# Allegro board Trans.brd
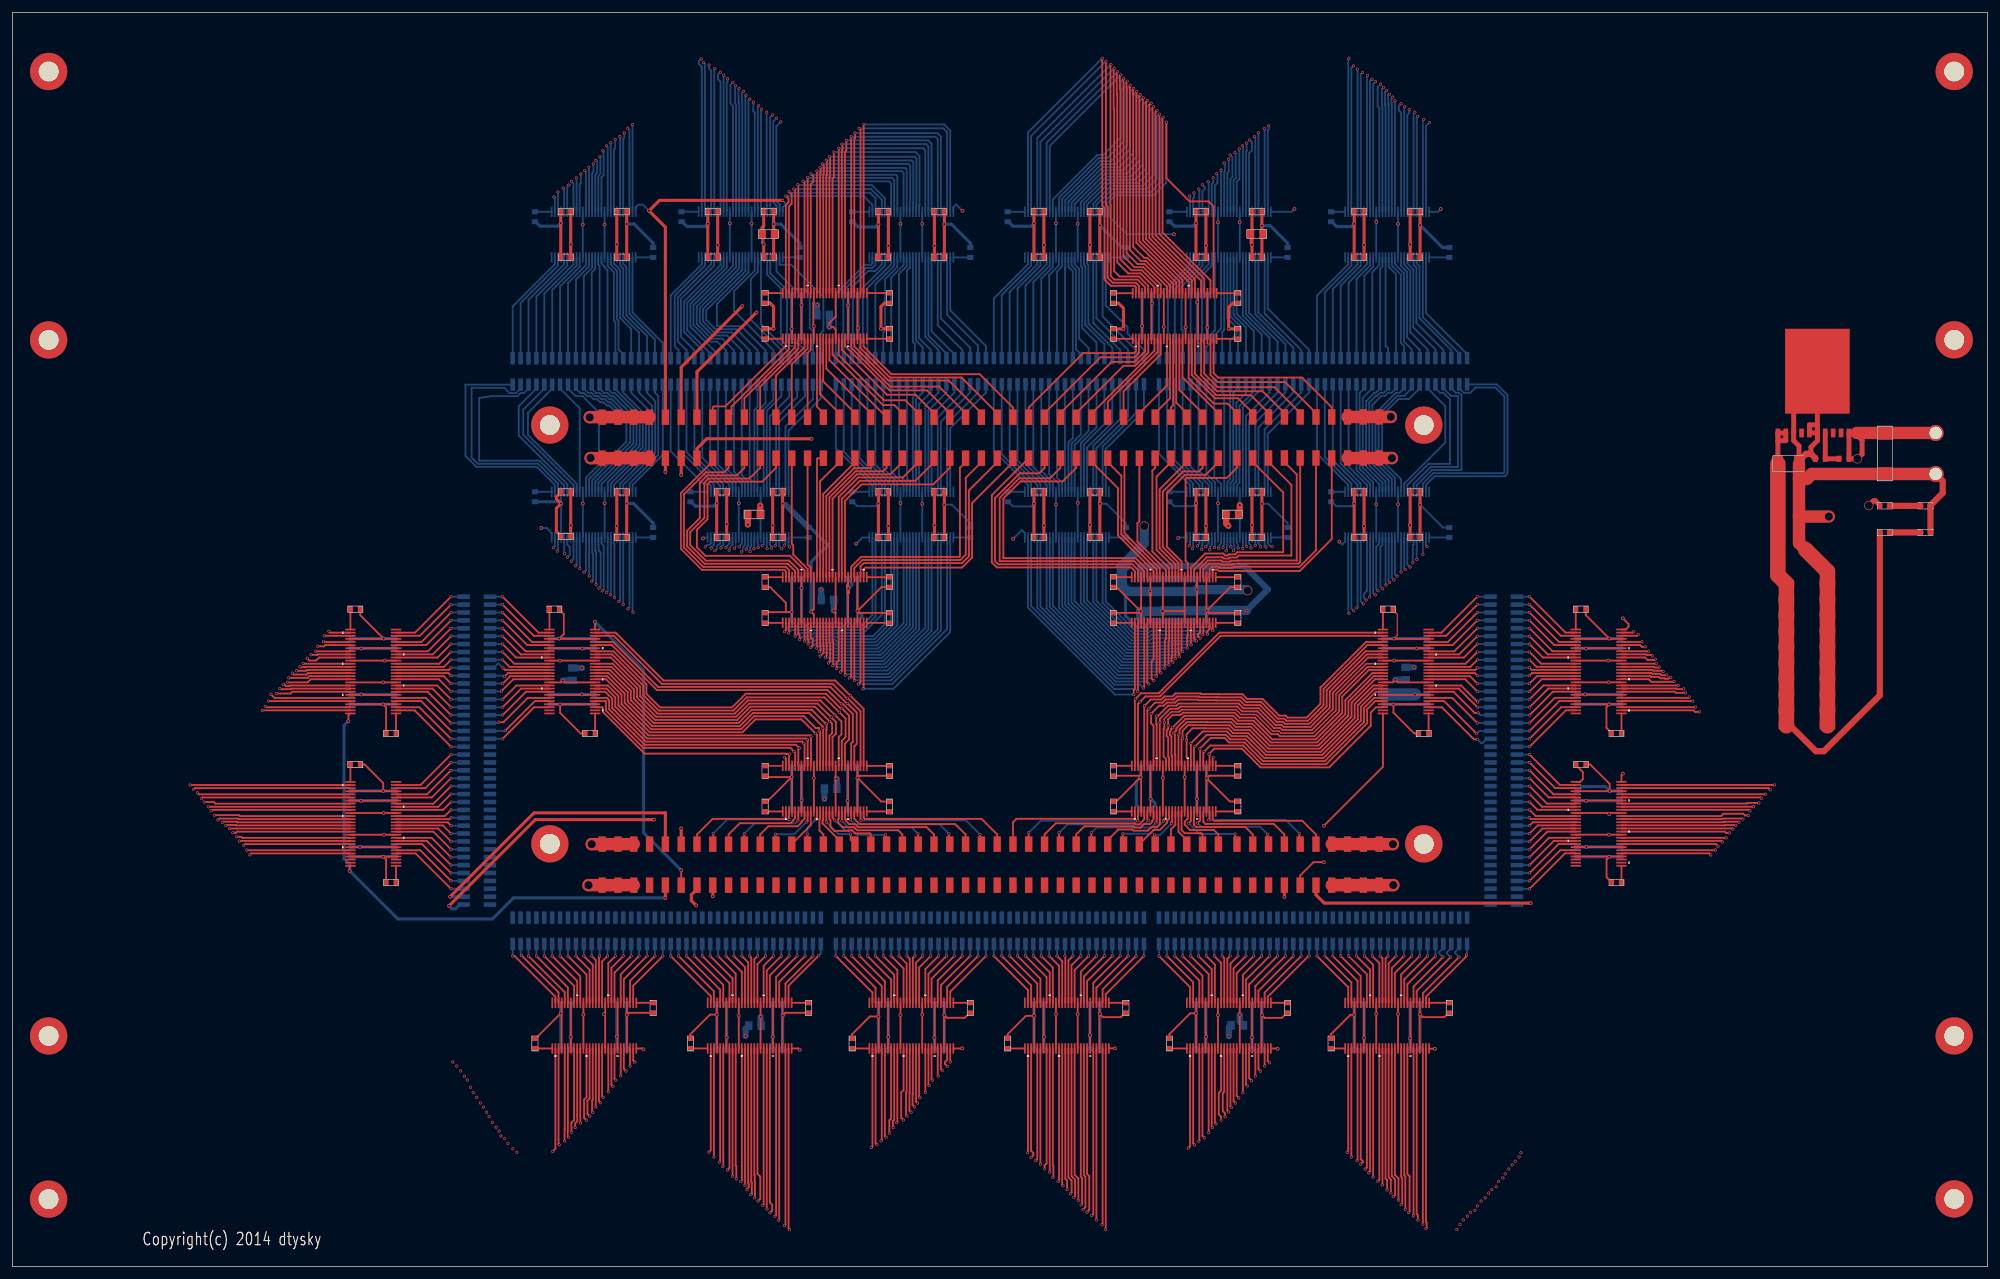
[diagram p0: board, top side]
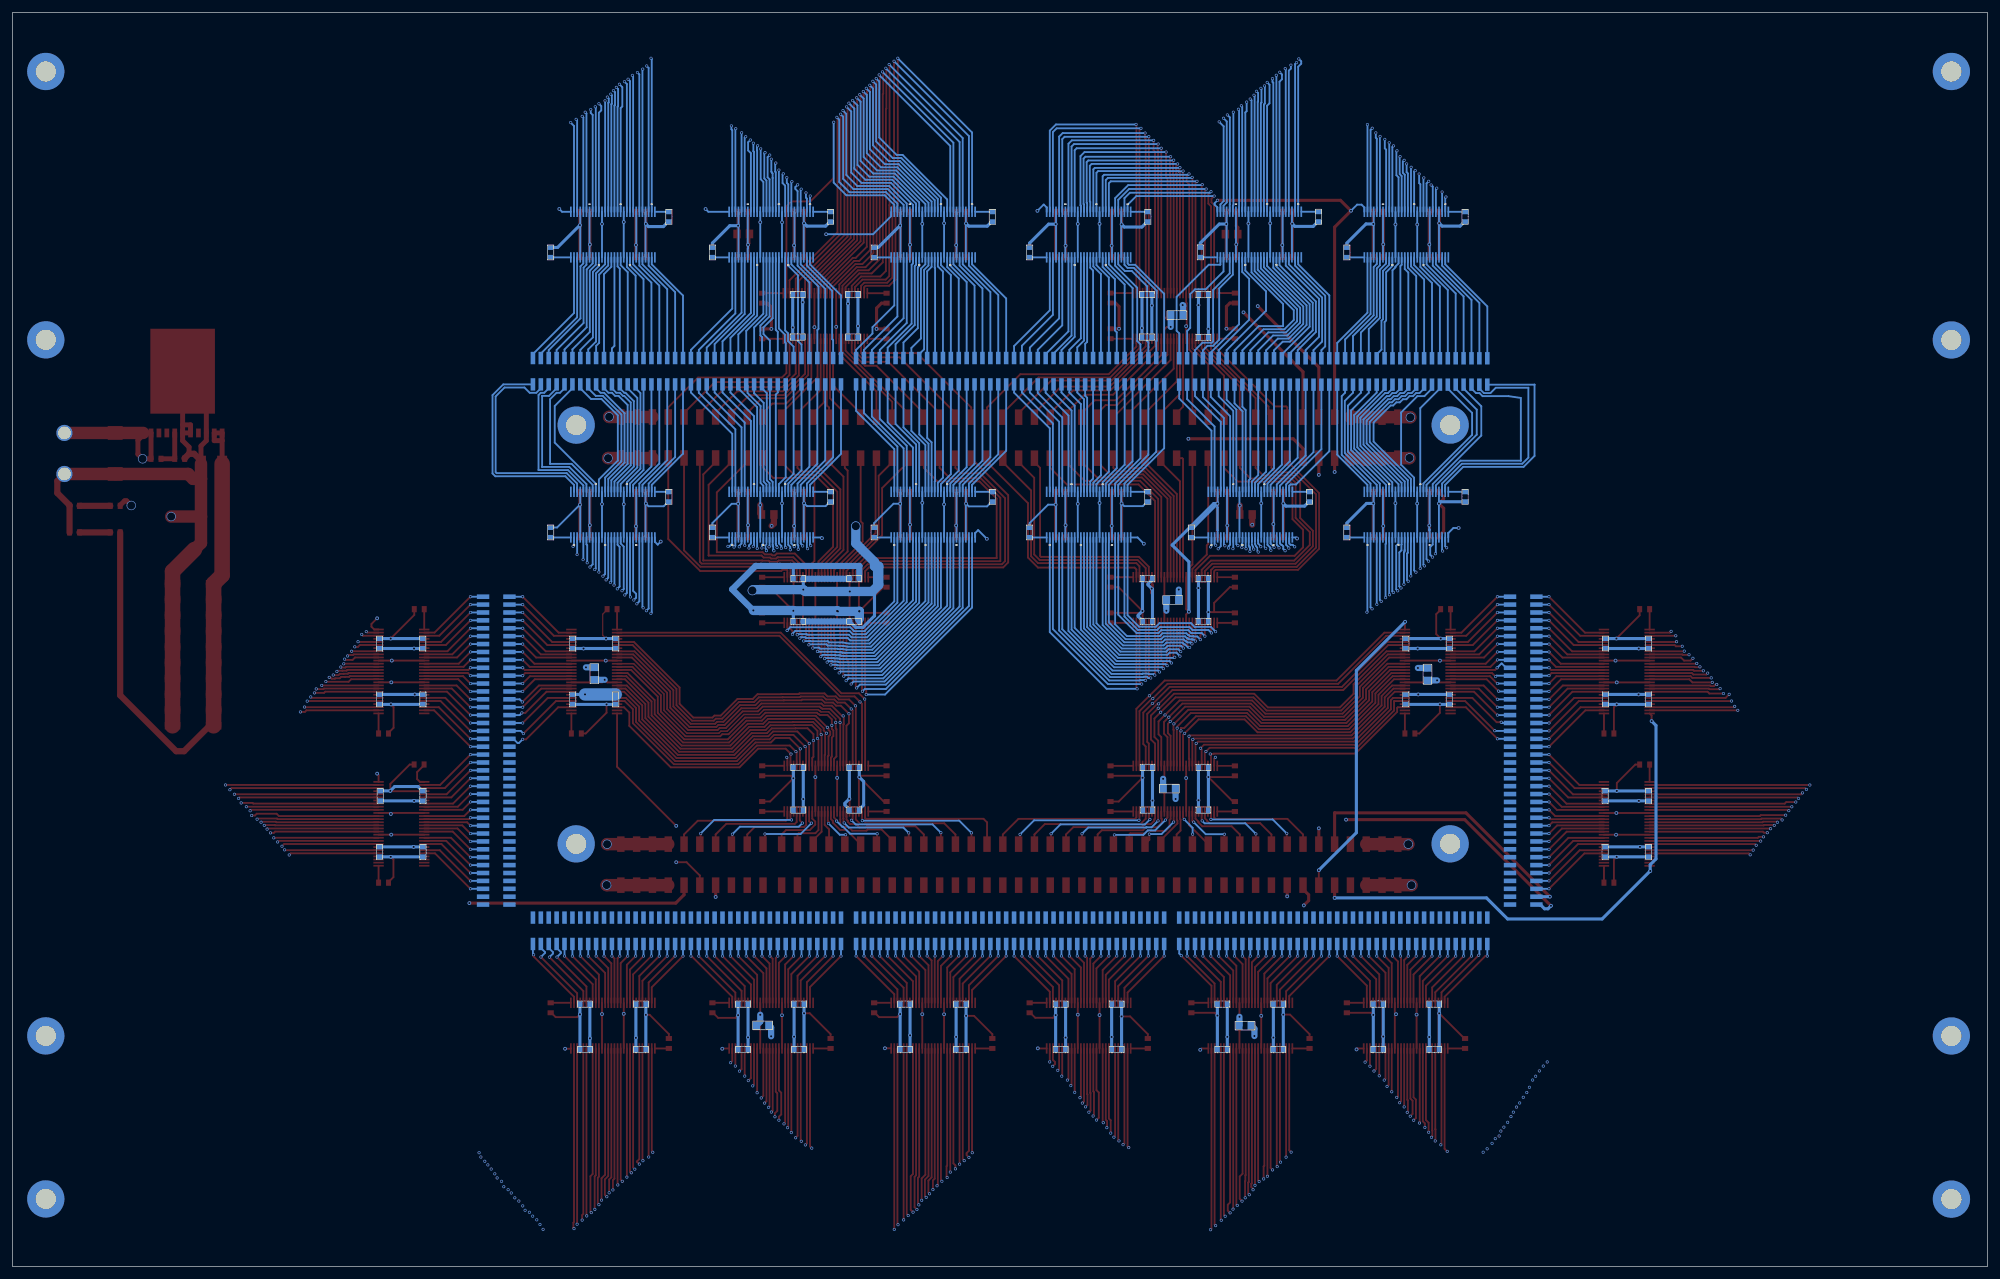
[diagram p1: board, bottom side, seen from below]

Outline 317.53 x 201.76 mm; copper layers: TOP, SIGNAL_1, SIGNAL_2, BOTTOM. Coordinates in mm from the lower left corner of the outline.
Outline path: rectangle 0,0 317.53,201.76

## Design rules (mm)
nets with their own width: min track width 0.5; nets DC GND VCC

## Placement (name value [footprint] x y rotation side)
C1  0.1u  [SMD_0603]  126.06 156.37 90 bottom
C2  0.1u  [SMD_0603]  135.15 156.37 270 bottom
C3  0.1u  [SMD_0603]  126.06 149.48 90 bottom
C4  0.1u  [SMD_0603]  135.16 149.54 270 bottom
C5  0.1u  [SMD_0603]  182.4 156.37 90 bottom
C6  0.1u  [SMD_0603]  191.29 156.37 270 bottom
C7  0.1u  [SMD_0603]  182.4 149.54 90 bottom
C8  0.1u  [SMD_0603]  191.29 149.54 270 bottom
C9  10u  [SMD_0805]  130.32 153.07 270 bottom
C10  0.1u  [SMD_0603]  126.06 110.65 90 bottom
C11  0.1u  [SMD_0603]  135.06 110.65 270 bottom
C12  0.1u  [SMD_0603]  126.06 103.78 90 bottom
C13  0.1u  [SMD_0603]  135.05 103.78 270 bottom
C14  0.1u  [SMD_0603]  182.18 110.65 90 bottom
C15  0.1u  [SMD_0603]  191.19 110.65 270 bottom
C16  0.1u  [SMD_0603]  182.18 103.78 90 bottom
C17  0.1u  [SMD_0603]  191.19 103.78 270 bottom
C18  10u  [SMD_0805]  131.02 107.24 270 bottom
C19  0.1u  [SMD_0603]  126.06 80.31 90 bottom
C20  0.1u  [SMD_0603]  135.05 80.31 270 bottom
C21  0.1u  [SMD_0603]  126.06 73.44 90 bottom
C22  0.1u  [SMD_0603]  135.05 73.44 270 bottom
C23  0.1u  [SMD_0603]  182.18 80.31 90 bottom
C24  0.1u  [SMD_0603]  191.19 80.31 270 bottom
C25  0.1u  [SMD_0603]  182.19 73.44 90 bottom
C26  0.1u  [SMD_0603]  191.19 73.44 270 bottom
C27  10u  [SMD_0805]  131.54 76.89 270 bottom
C28  22u  [SMD_1210]  285.52 129.15 90 top
C29  220u  [SMD_7343]  301.01 130.81 0 top
C30  10u  [SMD_0805]  121.53 166.09 90 top
C31  0.1u  [SMD_0603]  88.95 169.69 270 top
C32  0.1u  [SMD_0603]  97.95 169.69 90 top
C33  0.1u  [SMD_0603]  112.58 169.7 270 top
C34  0.1u  [SMD_0603]  121.58 169.7 90 top
C35  0.1u  [SMD_0603]  140.02 169.69 270 top
C36  0.1u  [SMD_0603]  149.02 169.69 90 top
C37  0.1u  [SMD_0603]  165.02 169.69 270 top
C38  0.1u  [SMD_0603]  174.02 169.69 90 top
C39  0.1u  [SMD_0603]  191.07 169.69 270 top
C40  0.1u  [SMD_0603]  200.07 169.69 90 top
C41  0.1u  [SMD_0603]  216.5 169.69 270 top
C42  0.1u  [SMD_0603]  225.5 169.69 90 top
C43  0.1u  [SMD_0603]  88.95 162.39 270 top
C44  0.1u  [SMD_0603]  97.95 162.39 90 top
C45  0.1u  [SMD_0603]  112.58 162.4 270 top
C46  0.1u  [SMD_0603]  121.58 162.4 90 top
C47  0.1u  [SMD_0603]  140.02 162.39 270 top
C48  0.1u  [SMD_0603]  149.02 162.39 90 top
C49  0.1u  [SMD_0603]  165.02 162.39 270 top
C50  0.1u  [SMD_0603]  174.02 162.39 90 top
C51  0.1u  [SMD_0603]  191.07 162.39 270 top
C52  0.1u  [SMD_0603]  200.07 162.39 90 top
C53  0.1u  [SMD_0603]  216.5 162.39 270 top
C54  0.1u  [SMD_0603]  225.5 162.39 90 top
C55  10u  [SMD_0805]  200.04 166.12 90 top
C56  10u  [SMD_0805]  119.22 120.99 90 top
C57  0.1u  [SMD_0603]  88.95 124.62 270 top
C58  0.1u  [SMD_0603]  97.95 124.62 90 top
C59  0.1u  [SMD_0603]  114.02 124.62 270 top
C60  0.1u  [SMD_0603]  123.02 124.62 90 top
C61  0.1u  [SMD_0603]  140.02 124.62 270 top
C62  0.1u  [SMD_0603]  149.02 124.62 90 top
C63  0.1u  [SMD_0603]  165.02 124.62 270 top
C64  0.1u  [SMD_0603]  174.02 124.62 90 top
C65  0.1u  [SMD_0603]  191.07 124.62 270 top
C66  0.1u  [SMD_0603]  200.07 124.62 90 top
C67  0.1u  [SMD_0603]  216.5 124.62 270 top
C68  0.1u  [SMD_0603]  225.5 124.62 90 top
C69  0.1u  [SMD_0603]  88.95 117.48 270 top
C70  0.1u  [SMD_0603]  97.95 117.32 90 top
C71  0.1u  [SMD_0603]  114.02 117.32 270 top
C72  0.1u  [SMD_0603]  123.02 117.32 90 top
C73  0.1u  [SMD_0603]  140.02 117.32 270 top
C74  0.1u  [SMD_0603]  149.02 117.32 90 top
C75  0.1u  [SMD_0603]  165.02 117.32 270 top
C76  0.1u  [SMD_0603]  174.02 117.32 90 top
C77  0.1u  [SMD_0603]  191.07 117.32 270 top
C78  0.1u  [SMD_0603]  200.07 117.32 90 top
C79  0.1u  [SMD_0603]  216.5 117.32 270 top
C80  0.1u  [SMD_0603]  225.5 117.32 90 top
C81  10u  [SMD_0805]  196.11 120.99 90 top
C82  10u  [SMD_0805]  119.37 38.76 270 bottom
C83  0.1u  [SMD_0603]  88.95 42.23 90 bottom
C84  0.1u  [SMD_0603]  97.95 42.23 270 bottom
C85  0.1u  [SMD_0603]  114.02 42.23 90 bottom
C86  0.1u  [SMD_0603]  123.02 42.23 270 bottom
C87  0.1u  [SMD_0603]  140.02 42.23 90 bottom
C88  0.1u  [SMD_0603]  149.02 42.23 270 bottom
C89  0.1u  [SMD_0603]  165.02 42.23 90 bottom
C90  0.1u  [SMD_0603]  174.02 42.23 270 bottom
C91  0.1u  [SMD_0603]  191.07 42.23 90 bottom
C92  0.1u  [SMD_0603]  200.07 42.23 270 bottom
C93  0.1u  [SMD_0603]  216.5 42.23 90 bottom
C94  0.1u  [SMD_0603]  225.5 42.23 270 bottom
C95  0.1u  [SMD_0603]  88.95 34.93 90 bottom
C96  0.1u  [SMD_0603]  97.95 34.93 270 bottom
C97  0.1u  [SMD_0603]  114.02 34.93 90 bottom
C98  0.1u  [SMD_0603]  123.02 34.93 270 bottom
C99  0.1u  [SMD_0603]  140.02 34.93 90 bottom
C100  0.1u  [SMD_0603]  149.02 34.93 270 bottom
C101  0.1u  [SMD_0603]  165.02 34.93 90 bottom
C102  0.1u  [SMD_0603]  174.02 34.93 270 bottom
C103  0.1u  [SMD_0603]  191.07 34.93 90 bottom
C104  0.1u  [SMD_0603]  200.07 34.93 270 bottom
C105  0.1u  [SMD_0603]  216.5 34.93 90 bottom
C106  0.1u  [SMD_0603]  225.5 34.93 270 bottom
C107  10u  [SMD_0805]  196.91 38.8 270 bottom
C108  0.1u  [SMD_0603]  54.49 100.23 0 bottom
C109  0.1u  [SMD_0603]  54.49 91.24 180 bottom
C110  0.1u  [SMD_0603]  61.42 100.23 0 bottom
C111  0.1u  [SMD_0603]  61.42 91.24 180 bottom
C112  0.1u  [SMD_0603]  54.5 75.72 0 bottom
C113  0.1u  [SMD_0603]  54.5 66.72 180 bottom
C114  0.1u  [SMD_0603]  61.49 75.72 0 bottom
C115  0.1u  [SMD_0603]  61.49 66.72 180 bottom
C116  0.1u  [SMD_0603]  86.53 100.24 0 bottom
C117  0.1u  [SMD_0603]  86.53 91.24 180 bottom
C118  0.1u  [SMD_0603]  93.52 100.23 0 bottom
C119  0.1u  [SMD_0603]  93.52 91.24 180 bottom
C120  0.1u  [SMD_0603]  220.54 100.23 0 bottom
C121  0.1u  [SMD_0603]  220.54 91.24 180 bottom
C122  0.1u  [SMD_0603]  227.46 100.23 0 bottom
C123  0.1u  [SMD_0603]  227.46 91.24 180 bottom
C124  0.1u  [SMD_0603]  251.56 100.23 0 bottom
C125  0.1u  [SMD_0603]  251.53 91.24 180 bottom
C126  0.1u  [SMD_0603]  258.52 100.23 0 bottom
C127  0.1u  [SMD_0603]  258.52 91.24 180 bottom
C128  0.1u  [SMD_0603]  251.53 75.72 0 bottom
C129  0.1u  [SMD_0603]  251.53 66.72 180 bottom
C130  0.1u  [SMD_0603]  258.41 75.73 0 bottom
C131  0.1u  [SMD_0603]  258.53 66.72 180 bottom
C132  10u  [SMD_0805]  90.04 95.3 180 bottom
C133  10u  [SMD_0805]  223.98 95.4 180 bottom
D1  0603_LED  [SMD_0603]  307.55 118.11 90 top
D2  0603_LED  [SMD_0603]  307.55 122.38 90 top
J1  Header_2X40  [HEADER_2X40_2D54_SMT_G]  144.34 133.35 90 top
J2  Header_2X10  [HEADER_2X10_2D54_SMT_G]  208.29 133.38 90 top
J3  Header_2X10  [HEADER_2X10_2D54_SMT_G]  288.49 98.43 0 top
J4  Header_2X40  [HEADER_2X40_2D54_SMT_G]  144.34 64.66 90 top
J5  Header_2X10  [HEADER_2X10_2D54_SMT_G]  208.29 64.66 90 top
J6  Header_2X40  [HEADER_2X40_1D27_SMT_M]  105.19 144 270 bottom
J7  Header_2X40  [HEADER_2X40_1D27_SMT_M]  157.14 144.04 270 bottom
J8  Header_2X40  [HEADER_2X40_1D27_SMT_M]  209.09 144.04 270 bottom
J9  Header_2X40  [HEADER_2X40_1D27_SMT_M]  74.65 83 180 bottom
J10  Header_2X40  [HEADER_2X40_1D27_SMT_M]  239.75 83 180 bottom
J11  Header_2X40  [HEADER_2X40_1D27_SMT_M]  105.19 54.02 270 bottom
J12  Header_2X40  [HEADER_2X40_1D27_SMT_M]  157.14 54.02 270 bottom
J13  Header_2X40  [HEADER_2X40_1D27_SMT_M]  209.09 54.02 270 bottom
J14  Header_1  [STITCH_2_MM]  309.18 134.11 0 top
J15  Header_1  [STITCH_2_MM]  309.18 127.51 0 top
J16  Header_1  [HOLE_3D2]  86.39 135.38 0 top
J17  Header_1  [HOLE_3D2]  226.9 135.37 0 top
J18  Header_1  [HOLE_3D2]  86.4 68.01 0 top
J19  Header_1  [HOLE_3D2]  226.9 68 0 top
J20  Header_1  [HOLE_3D2]  5.82 192.26 0 top
J21  Header_1  [HOLE_3D2]  5.82 149.07 0 top
J22  Header_1  [HOLE_3D2]  5.82 37.1 0 top
J23  Header_1  [HOLE_3D2]  5.81 10.85 0 top
J24  Header_1  [HOLE_3D2]  312.17 192.26 0 top
J25  Header_1  [HOLE_3D2]  312.17 149.09 0 top
J26  Header_1  [HOLE_3D2]  312.17 37.11 0 top
J27  Header_1  [HOLE_3D2]  312.17 10.88 0 top
R1  4.7K  [SMD_0603]  141 155.81 0 top
R2  4.7K  [SMD_0603]  121 155.81 0 top
R3  4.7K  [SMD_0603]  177 155.79 0 top
R4  4.7K  [SMD_0603]  197 155.79 0 top
R5  4.7K  [SMD_0603]  121 150.07 180 top
R6  4.7K  [SMD_0603]  177 150.05 180 top
R7  4.7K  [SMD_0603]  141 150.07 180 top
R8  4.7K  [SMD_0603]  197 150.05 180 top
R9  4.7K  [SMD_0603]  121 110.1 0 top
R10  4.7K  [SMD_0603]  177 110.1 0 top
R11  4.7K  [SMD_0603]  141 110.1 0 top
R12  4.7K  [SMD_0603]  197 110.1 0 top
R13  4.7K  [SMD_0603]  141 104.36 180 top
R14  4.7K  [SMD_0603]  197 104.36 180 top
R15  4.7K  [SMD_0603]  121 104.36 180 top
R16  4.7K  [SMD_0603]  177 104.36 180 top
R17  4.7K  [SMD_0603]  121 79.75 0 top
R18  4.7K  [SMD_0603]  141 79.75 0 top
R19  4.7K  [SMD_0603]  197 79.76 0 top
R20  4.7K  [SMD_0603]  177 79.76 0 top
R21  4.7K  [SMD_0603]  121 74.01 180 top
R22  4.7K  [SMD_0603]  177 74.02 180 top
R23  4.7K  [SMD_0603]  141 74.01 180 top
R24  4.7K  [SMD_0603]  197 74.02 180 top
R25  3.32K  [SMD_0603]  294.45 129.95 90 top
R26  1.07K  [SMD_0603]  290.64 129.95 270 top
R27  1K  [SMD_0603]  301.01 118.11 90 top
R28  1K  [SMD_0603]  301.01 122.38 90 top
R29  4.7K  [SMD_0603]  103 163.15 0 bottom
R30  4.7K  [SMD_0603]  126.56 163.16 0 bottom
R31  4.7K  [SMD_0603]  154 163.15 0 bottom
R32  4.7K  [SMD_0603]  179 163.15 0 bottom
R33  4.7K  [SMD_0603]  205 163.15 0 bottom
R34  4.7K  [SMD_0603]  231 163.15 0 bottom
R35  4.7K  [SMD_0603]  84 168.89 0 bottom
R36  4.7K  [SMD_0603]  107.56 168.9 0 bottom
R37  4.7K  [SMD_0603]  135 168.89 0 bottom
R38  4.7K  [SMD_0603]  160 168.89 0 bottom
R39  4.7K  [SMD_0603]  186 168.89 0 bottom
R40  4.7K  [SMD_0603]  212 168.89 0 bottom
R41  4.7K  [SMD_0603]  103 118.1 180 bottom
R42  4.7K  [SMD_0603]  128 118.1 180 bottom
R43  4.7K  [SMD_0603]  154 118.1 180 bottom
R44  4.7K  [SMD_0603]  179 118.1 180 bottom
R45  4.7K  [SMD_0603]  205 118.1 180 bottom
R46  4.7K  [SMD_0603]  231 118.1 180 bottom
R47  4.7K  [SMD_0603]  84 123.84 180 bottom
R48  4.7K  [SMD_0603]  109 123.84 180 bottom
R49  4.7K  [SMD_0603]  135 123.84 180 bottom
R50  4.7K  [SMD_0603]  160 123.84 180 bottom
R51  4.7K  [SMD_0603]  186 123.84 180 bottom
R52  4.7K  [SMD_0603]  212 123.84 180 bottom
R53  4.7K  [SMD_0603]  252.13 105.76 270 top
R54  4.7K  [SMD_0603]  55.13 105.76 90 top
R55  4.7K  [SMD_0603]  87.13 105.76 90 top
R56  4.7K  [SMD_0603]  221.13 105.76 90 top
R57  4.7K  [SMD_0603]  257.87 85.76 270 top
R58  4.7K  [SMD_0603]  252.15 80.77 270 top
R59  4.7K  [SMD_0603]  55.13 80.76 90 top
R60  4.7K  [SMD_0603]  60.87 85.76 90 top
R61  4.7K  [SMD_0603]  92.87 85.76 90 top
R62  4.7K  [SMD_0603]  226.87 85.76 90 top
R63  4.7K  [SMD_0603]  257.87 61.76 270 top
R64  4.7K  [SMD_0603]  60.87 61.76 90 top
R65  4.7K  [SMD_0603]  103 41.63 0 top
R66  4.7K  [SMD_0603]  128 41.63 0 top
R67  4.7K  [SMD_0603]  154 41.63 0 top
R68  4.7K  [SMD_0603]  179 41.63 0 top
R69  4.7K  [SMD_0603]  205 41.63 0 top
R70  4.7K  [SMD_0603]  231 41.63 0 top
R71  4.7K  [SMD_0603]  84 35.89 0 top
R72  4.7K  [SMD_0603]  109 35.89 0 top
R73  4.7K  [SMD_0603]  135 35.89 0 top
R74  4.7K  [SMD_0603]  160 35.89 0 top
R75  4.7K  [SMD_0603]  186 35.89 0 top
R76  4.7K  [SMD_0603]  212 35.89 0 top
U1  Value  [DGG56]  130.59 152.94 270 top
U2  Value  [DGG56]  186.85 152.92 270 top
U3  Value  [DGG56]  130.59 107.23 90 top
U4  Value  [DGG56]  186.7 107.23 90 top
U5  Value  [DGG56]  130.59 76.88 270 top
U6  Value  [DGG56]  186.7 76.89 270 top
U7  Value  [TZA11A]  290.17 144.27 0 top
U8  Value  [DGG56]  93.44 166.02 90 bottom
U9  Value  [DGG56]  117.08 166.03 90 bottom
U10  Value  [DGG56]  144.51 166.02 90 bottom
U11  Value  [DGG56]  169.51 166.02 90 bottom
U12  Value  [DGG56]  195.56 166.02 90 bottom
U13  Value  [DGG56]  221 166.02 90 bottom
U14  Value  [DGG56]  93.45 120.97 270 bottom
U15  Value  [DGG56]  118.52 120.97 270 bottom
U16  Value  [DGG56]  144.51 120.97 270 bottom
U17  Value  [DGG56]  169.51 120.97 270 bottom
U18  Value  [DGG56]  195.56 120.97 270 bottom
U19  Value  [DGG56]  221 120.97 270 bottom
U20  Value  [DGG56]  255 95.74 0 top
U21  Value  [DGG56]  58 95.73 180 top
U22  Value  [DGG56]  90 95.73 0 top
U23  Value  [DGG56]  224 95.73 180 top
U24  Value  [DGG56]  255 71.23 0 top
U25  Value  [DGG56]  58 71.22 180 top
U26  Value  [DGG56]  93.54 38.76 270 top
U27  Value  [DGG56]  118.52 38.76 270 top
U28  Value  [DGG56]  144.51 38.76 270 top
U29  Value  [DGG56]  169.51 38.76 270 top
U30  Value  [DGG56]  195.56 38.76 270 top
U31  Value  [DGG56]  221 38.76 270 top

## Library data of the parts
C1-C27 C30-C133 = CAP NP
C28 C29 = CAP POL
D1 D2 = DIODE SCHOTTKY
J1 J4 J6-J13 = Header_2X40
J2 J3 J5 = Header_2X10
J14-J27 = Header_1
R1-R76 = R
U1-U6 = SN74ALVCH162827_DGG_56
U7 = LMZ22010_NDY_11
U8-U31 = SN74ALVCH16721_DGG_56

## Footprints (pads in the part's own frame, mm; a bottom-side part is the same pattern mirrored in y, then rotated)
DGG56
  rect 1.676x0.279 smd: 1(-3.67,6.75) 2(-3.67,6.25) 3(-3.67,5.75) 4(-3.67,5.25) 5(-3.67,4.75) 6(-3.67,4.25) 7(-3.67,3.75) 8(-3.67,3.25) 9(-3.67,2.75) 10(-3.67,2.25) 11(-3.67,1.75) 12(-3.67,1.25) 13(-3.67,0.75) 14(-3.67,0.25) 15(-3.67,-0.25) 16(-3.67,-0.75) 17(-3.67,-1.25) 18(-3.67,-1.75) 19(-3.67,-2.25) 20(-3.67,-2.75) 21(-3.67,-3.25) 22(-3.67,-3.75) 23(-3.67,-4.25) 24(-3.67,-4.75) 25(-3.67,-5.25) 26(-3.67,-5.75) 27(-3.67,-6.25) 28(-3.67,-6.75) 29(3.67,-6.75) 30(3.67,-6.25) 31(3.67,-5.75) 32(3.67,-5.25) 33(3.67,-4.75) 34(3.67,-4.25) 35(3.67,-3.75) 36(3.67,-3.25) 37(3.67,-2.75) 38(3.67,-2.25) 39(3.67,-1.75) 40(3.67,-1.25) 41(3.67,-0.75) 42(3.67,-0.25) 43(3.67,0.25) 44(3.67,0.75) 45(3.67,1.25) 46(3.67,1.75) 47(3.67,2.25) 48(3.67,2.75) 49(3.67,3.25) 50(3.67,3.75) 51(3.67,4.25) 52(3.67,4.75) 53(3.67,5.25) 54(3.67,5.75) 55(3.67,6.25) 56(3.67,6.75)
HEADER_2X10_2D54_SMT_G
  rect 2.5x1.2 smd: 1(-3.3,11.43) 2(-3.3,8.89) 3(-3.3,6.35) 4(-3.3,3.81) 5(-3.3,1.27) 6(-3.3,-1.27) 7(-3.3,-3.81) 8(-3.3,-6.35) 9(-3.3,-8.89) 10(-3.3,-11.43) 11(3.3,-11.43) 12(3.3,-8.89) 13(3.3,-6.35) 14(3.3,-3.81) 15(3.3,-1.27) 16(3.3,1.27) 17(3.3,3.81) 18(3.3,6.35) 19(3.3,8.89) 20(3.3,11.43)
HEADER_2X40_1D27_SMT_M
  rect 2x0.74 smd: 1(-2.12,24.765) 2(-2.12,23.495) 3(-2.12,22.225) 4(-2.12,20.955) 5(-2.12,19.685) 6(-2.12,18.415) 7(-2.12,17.145) 8(-2.12,15.875) 9(-2.12,14.605) 10(-2.12,13.335) 11(-2.12,12.065) 12(-2.12,10.795) 13(-2.12,9.525) 14(-2.12,8.255) 15(-2.12,6.985) 16(-2.12,5.715) 17(-2.12,4.445) 18(-2.12,3.175) 19(-2.12,1.905) 20(-2.12,0.635) 21(-2.12,-0.635) 22(-2.12,-1.905) 23(-2.12,-3.175) 24(-2.12,-4.445) 25(-2.12,-5.715) 26(-2.12,-6.985) 27(-2.12,-8.255) 28(-2.12,-9.525) 29(-2.12,-10.795) 30(-2.12,-12.065) 31(-2.12,-13.335) 32(-2.12,-14.605) 33(-2.12,-15.875) 34(-2.12,-17.145) 35(-2.12,-18.415) 36(-2.12,-19.685) 37(-2.12,-20.955) 38(-2.12,-22.225) 39(-2.12,-23.495) 40(-2.12,-24.765) 41(2.12,-24.765) 42(2.12,-23.495) 43(2.12,-22.225) 44(2.12,-20.955) 45(2.12,-19.685) 46(2.12,-18.415) 47(2.12,-17.145) 48(2.12,-15.875) 49(2.12,-14.605) 50(2.12,-13.335) 51(2.12,-12.065) 52(2.12,-10.795) 53(2.12,-9.525) 54(2.12,-8.255) 55(2.12,-6.985) 56(2.12,-5.715) 57(2.12,-4.445) 58(2.12,-3.175) 59(2.12,-1.905) 60(2.12,-0.635) 61(2.12,0.635) 62(2.12,1.905) 63(2.12,3.175) 64(2.12,4.445) 65(2.12,5.715) 66(2.12,6.985) 67(2.12,8.255) 68(2.12,9.525) 69(2.12,10.795) 70(2.12,12.065) 71(2.12,13.335) 72(2.12,14.605) 73(2.12,15.875) 74(2.12,17.145) 75(2.12,18.415) 76(2.12,19.685) 77(2.12,20.955) 78(2.12,22.225) 79(2.12,23.495) 80(2.12,24.765)
HEADER_2X40_2D54_SMT_G
  rect 2.5x1.2 smd: 1(-3.3,49.53) 2(-3.3,46.99) 3(-3.3,44.45) 4(-3.3,41.91) 5(-3.3,39.37) 6(-3.3,36.83) 7(-3.3,34.29) 8(-3.3,31.75) 9(-3.3,29.21) 10(-3.3,26.67) 11(-3.3,24.13) 12(-3.3,21.59) 13(-3.3,19.05) 14(-3.3,16.51) 15(-3.3,13.97) 16(-3.3,11.43) 17(-3.3,8.89) 18(-3.3,6.35) 19(-3.3,3.81) 20(-3.3,1.27) 21(-3.3,-1.27) 22(-3.3,-3.81) 23(-3.3,-6.35) 24(-3.3,-8.89) 25(-3.3,-11.43) 26(-3.3,-13.97) 27(-3.3,-16.51) 28(-3.3,-19.05) 29(-3.3,-21.59) 30(-3.3,-24.13) 31(-3.3,-26.67) 32(-3.3,-29.21) 33(-3.3,-31.75) 34(-3.3,-34.29) 35(-3.3,-36.83) 36(-3.3,-39.37) 37(-3.3,-41.91) 38(-3.3,-44.45) 39(-3.3,-46.99) 40(-3.3,-49.53) 41(3.3,-49.53) 42(3.3,-46.99) 43(3.3,-44.45) 44(3.3,-41.91) 45(3.3,-39.37) 46(3.3,-36.83) 47(3.3,-34.29) 48(3.3,-31.75) 49(3.3,-29.21) 50(3.3,-26.67) 51(3.3,-24.13) 52(3.3,-21.59) 53(3.3,-19.05) 54(3.3,-16.51) 55(3.3,-13.97) 56(3.3,-11.43) 57(3.3,-8.89) 58(3.3,-6.35) 59(3.3,-3.81) 60(3.3,-1.27) 61(3.3,1.27) 62(3.3,3.81) 63(3.3,6.35) 64(3.3,8.89) 65(3.3,11.43) 66(3.3,13.97) 67(3.3,16.51) 68(3.3,19.05) 69(3.3,21.59) 70(3.3,24.13) 71(3.3,26.67) 72(3.3,29.21) 73(3.3,31.75) 74(3.3,34.29) 75(3.3,36.83) 76(3.3,39.37) 77(3.3,41.91) 78(3.3,44.45) 79(3.3,46.99) 80(3.3,49.53)
HOLE_3D2
  round 6 hole 3.2: 1(0,0)
SMD_0603
  rect 1x0.8 smd: 1(0,0.8) 2(0,-0.8)
SMD_0805
  rect 1.4x1.2 smd: 1(0,1) 2(0,-1)
SMD_1210
  rect 2.6x1.6 smd: 1(0,1.7) 2(0,-1.7)
SMD_7343
  rect 2.4x2.2 smd: 1(0,3.3) 2(0,-3.3)
STITCH_2_MM
  round 2.6 hole 2: 1(0,0)
TZA11A
  rect 0.762x1.422 smd: 1(-6.35,-10.16) 2(-5.08,-10.16) 3(-3.81,-10.16) 4(-2.54,-10.16) 5(-1.27,-10.16) 6(0,-10.16) 7(1.27,-10.16) 8(2.54,-10.16) 9(3.81,-10.16) 10(5.08,-10.16) 11(6.35,-10.16)
  rect 10.389x13.665 smd: 12(0,-0.229)

## Nets
GND: C1.2 C2.2 C3.2 C4.2 C5.2 C6.2 C7.2 C8.2 C9.2 C10.2 C11.2 C12.2 C13.2 C14.2 C15.2 C16.2 C17.2 C18.2 C19.2 C20.2 C21.2 C22.2 C23.2 C24.2 C25.2 C26.2 C27.2 C28.2 C29.2 C30.2 C31.2 C32.2 C33.2 C34.2 C35.2 C36.2 C37.2 C38.2 C39.2 C40.2 C41.2 C42.2 C43.2 C44.2 C45.2 C46.2 C47.2 C48.2 C49.2 C50.2 C51.2 C52.2 C53.2 C54.2 C55.2 C56.2 C57.2 C58.2 C59.2 C60.2 C61.2 C62.2 C63.2 C64.2 C65.2 C66.2 C67.2 C68.2 C69.2 C70.2 C71.2 C72.2 C73.2 C74.2 C75.2 C76.2 C77.2 C78.2 C79.2 C80.2 C81.2 C82.2 C83.2 C84.2 C85.2 C86.2 C87.2 C88.2 C89.2 C90.2 C91.2 C92.2 C93.2 C94.2 C95.2 C96.2 C97.2 C98.2 C99.2 C100.2 C101.2 C102.2 C103.2 C104.2 C105.2 C106.2 C107.2 C108.2 C109.2 C110.2 C111.2 C112.2 C113.2 C114.2 C115.2 C116.2 C117.2 C118.2 C119.2 C120.2 C121.2 C122.2 C123.2 C124.2 C125.2 C126.2 C127.2 C128.2 C129.2 C130.2 C131.2 C132.2 C133.2 D1.2(CATHODE) D2.2(CATHODE) J1.1(DIP_1) J1.2(DIP_2) J1.3(DIP_3) J1.4(DIP_4) J2.8(DIP_8) J2.9(DIP_9) J2.10(DIP_10) J3.11(DIP_11) J3.12(DIP_12) J3.13(DIP_13) J3.14(DIP_14) J3.15(DIP_15) J3.16(DIP_16) J3.17(DIP_17) J3.18(DIP_18) J3.19(DIP_19) J3.20(DIP_20) J4.1(DIP_1) J4.2(DIP_2) J4.3(DIP_3) J5.7(DIP_7) J5.8(DIP_8) J5.9(DIP_9) J5.10(DIP_10) J15.1 R1.2 R2.2 R3.2 R4.2 R5.2 R6.2 R7.2 R8.2 R9.2 R10.2 R11.2 R12.2 R13.2 R14.2 R15.2 R16.2 R17.2 R18.2 R19.2 R20.2 R21.2 R22.2 R23.2 R24.2 R26.2 R29.2 R30.2 R31.2 R32.2 R33.2 R34.2 R35.1 R36.1 R37.1 R38.1 R39.1 R40.1 R41.1 R42.1 R43.1 R44.1 R45.1 R46.1 R47.2 R48.2 R49.2 R50.2 R51.2 R52.2 R53.1 R54.2 R55.2 R56.2 R57.2 R58.1 R59.2 R60.1 R61.1 R62.1 R63.2 R64.1 R65.2 R66.2 R67.2 R68.2 R69.2 R70.2 R71.1 R72.1 R73.1 R74.1 R75.1 R76.1 U1.4(GND) U1.11(GND_1) U1.18(GND_2) U1.25(GND_3) U1.32(GND_4) U1.39(GND_5) U1.46(GND_6) U1.53(GND_7) U2.4(GND) U2.11(GND_1) U2.18(GND_2) U2.25(GND_3) U2.32(GND_4) U2.39(GND_5) U2.46(GND_6) U2.53(GND_7) U3.4(GND) U3.11(GND_1) U3.18(GND_2) U3.25(GND_3) U3.32(GND_4) U3.39(GND_5) U3.46(GND_6) U3.53(GND_7) U4.4(GND) U4.11(GND_1) U4.18(GND_2) U4.25(GND_3) U4.32(GND_4) U4.39(GND_5) U4.46(GND_6) U4.53(GND_7) U5.4(GND) U5.11(GND_1) U5.18(GND_2) U5.25(GND_3) U5.32(GND_4) U5.39(GND_5) U5.46(GND_6) U5.53(GND_7) U6.4(GND) U6.11(GND_1) U6.18(GND_2) U6.25(GND_3) U6.32(GND_4) U6.39(GND_5) U6.46(GND_6) U6.53(GND_7) U7.3(SYNC) U7.5(AGND) U7.6(AGND_1) U7.12 U8.4(GND) U8.11(GND_1) U8.18(GND_2) U8.25(GND_3) U8.32(GND_4) U8.39(GND_5) U8.46(GND_6) U8.53(GND_7) U9.4(GND) U9.11(GND_1) U9.18(GND_2) U9.25(GND_3) U9.32(GND_4) U9.39(GND_5) U9.46(GND_6) U9.53(GND_7) U10.4(GND) U10.11(GND_1) U10.18(GND_2) U10.25(GND_3) U10.32(GND_4) U10.39(GND_5) U10.46(GND_6) U10.53(GND_7) U11.4(GND) U11.11(GND_1) U11.18(GND_2) U11.25(GND_3) U11.32(GND_4) U11.39(GND_5) U11.46(GND_6) U11.53(GND_7) U12.4(GND) U12.11(GND_1) U12.18(GND_2) U12.25(GND_3) U12.32(GND_4) U12.39(GND_5) U12.46(GND_6) U12.53(GND_7) U13.4(GND) U13.11(GND_1) U13.18(GND_2) U13.25(GND_3) U13.32(GND_4) U13.39(GND_5) U13.46(GND_6) U13.53(GND_7) U14.4(GND) U14.11(GND_1) U14.18(GND_2) U14.25(GND_3) U14.32(GND_4) U14.39(GND_5) U14.46(GND_6) U14.53(GND_7) U15.4(GND) U15.11(GND_1) U15.18(GND_2) U15.25(GND_3) U15.32(GND_4) U15.39(GND_5) U15.46(GND_6) U15.53(GND_7) U16.4(GND) U16.11(GND_1) U16.18(GND_2) U16.25(GND_3) U16.32(GND_4) U16.39(GND_5) U16.46(GND_6) U16.53(GND_7) U17.4(GND) U17.11(GND_1) U17.18(GND_2) U17.25(GND_3) U17.32(GND_4) U17.39(GND_5) U17.46(GND_6) U17.53(GND_7) U18.4(GND) U18.11(GND_1) U18.18(GND_2) U18.25(GND_3) U18.32(GND_4) U18.39(GND_5) U18.46(GND_6) U18.53(GND_7) U19.4(GND) U19.11(GND_1) U19.18(GND_2) U19.25(GND_3) U19.32(GND_4) U19.39(GND_5) U19.46(GND_6) U19.53(GND_7) U20.4(GND) U20.11(GND_1) U20.18(GND_2) U20.25(GND_3) U20.32(GND_4) U20.39(GND_5) U20.46(GND_6) U20.53(GND_7) U21.4(GND) U21.11(GND_1) U21.18(GND_2) U21.25(GND_3) U21.32(GND_4) U21.39(GND_5) U21.46(GND_6) U21.53(GND_7) U22.4(GND) U22.11(GND_1) U22.18(GND_2) U22.25(GND_3) U22.32(GND_4) U22.39(GND_5) U22.46(GND_6) U22.53(GND_7) U23.4(GND) U23.11(GND_1) U23.18(GND_2) U23.25(GND_3) U23.32(GND_4) U23.39(GND_5) U23.46(GND_6) U23.53(GND_7) U24.4(GND) U24.11(GND_1) U24.18(GND_2) U24.25(GND_3) U24.32(GND_4) U24.39(GND_5) U24.46(GND_6) U24.53(GND_7) U25.4(GND) U25.11(GND_1) U25.18(GND_2) U25.25(GND_3) U25.32(GND_4) U25.39(GND_5) U25.46(GND_6) U25.53(GND_7) U26.4(GND) U26.11(GND_1) U26.18(GND_2) U26.25(GND_3) U26.32(GND_4) U26.39(GND_5) U26.46(GND_6) U26.53(GND_7) U27.4(GND) U27.11(GND_1) U27.18(GND_2) U27.25(GND_3) U27.32(GND_4) U27.39(GND_5) U27.46(GND_6) U27.53(GND_7) U28.4(GND) U28.11(GND_1) U28.18(GND_2) U28.25(GND_3) U28.32(GND_4) U28.39(GND_5) U28.46(GND_6) U28.53(GND_7) U29.4(GND) U29.11(GND_1) U29.18(GND_2) U29.25(GND_3) U29.32(GND_4) U29.39(GND_5) U29.46(GND_6) U29.53(GND_7) U30.4(GND) U30.11(GND_1) U30.18(GND_2) U30.25(GND_3) U30.32(GND_4) U30.39(GND_5) U30.46(GND_6) U30.53(GND_7) U31.4(GND) U31.11(GND_1) U31.18(GND_2) U31.25(GND_3) U31.32(GND_4) U31.39(GND_5) U31.46(GND_6) U31.53(GND_7)
VCC: C1.1 C2.1 C3.1 C4.1 C5.1 C6.1 C7.1 C8.1 C9.1 C10.1 C11.1 C12.1 C13.1 C14.1 C15.1 C16.1 C17.1 C18.1 C19.1 C20.1 C21.1 C22.1 C23.1 C24.1 C25.1 C26.1 C27.1 C30.1 C31.1 C32.1 C33.1 C34.1 C35.1 C36.1 C37.1 C38.1 C39.1 C40.1 C41.1 C42.1 C43.1 C44.1 C45.1 C46.1 C47.1 C48.1 C49.1 C50.1 C51.1 C52.1 C53.1 C54.1 C55.1 C56.1 C57.1 C58.1 C59.1 C60.1 C61.1 C62.1 C63.1 C64.1 C65.1 C66.1 C67.1 C68.1 C69.1 C70.1 C71.1 C72.1 C73.1 C74.1 C75.1 C76.1 C77.1 C78.1 C79.1 C80.1 C81.1 C82.1 C83.1 C84.1 C85.1 C86.1 C87.1 C88.1 C89.1 C90.1 C91.1 C92.1 C93.1 C94.1 C95.1 C96.1 C97.1 C98.1 C99.1 C100.1 C101.1 C102.1 C103.1 C104.1 C105.1 C106.1 C107.1 C108.1 C109.1 C110.1 C111.1 C112.1 C113.1 C114.1 C115.1 C116.1 C117.1 C118.1 C119.1 C120.1 C121.1 C122.1 C123.1 C124.1 C125.1 C126.1 C127.1 C128.1 C129.1 C130.1 C131.1 C132.1 C133.1 J1.77(DIP_77) J1.78(DIP_78) J1.79(DIP_79) J1.80(DIP_80) J2.11(DIP_11) J2.12(DIP_12) J2.13(DIP_13) J4.78(DIP_78) J4.79(DIP_79) J4.80(DIP_80) J5.11(DIP_11) J5.12(DIP_12) J5.13(DIP_13) J5.14(DIP_14) U1.7(VCC) U1.22(VCC_1) U1.35(VCC_2) U1.50(VCC_3) U2.7(VCC) U2.22(VCC_1) U2.35(VCC_2) U2.50(VCC_3) U3.7(VCC) U3.22(VCC_1) U3.35(VCC_2) U3.50(VCC_3) U4.7(VCC) U4.22(VCC_1) U4.35(VCC_2) U4.50(VCC_3) U5.7(VCC) U5.22(VCC_1) U5.35(VCC_2) U5.50(VCC_3) U6.7(VCC) U6.22(VCC_1) U6.35(VCC_2) U6.50(VCC_3) U8.7(VCC) U8.22(VCC_1) U8.35(VCC_2) U8.50(VCC_3) U9.7(VCC) U9.22(VCC_1) U9.35(VCC_2) U9.50(VCC_3) U10.7(VCC) U10.22(VCC_1) U10.35(VCC_2) U10.50(VCC_3) U11.7(VCC) U11.22(VCC_1) U11.35(VCC_2) U11.50(VCC_3) U12.7(VCC) U12.22(VCC_1) U12.35(VCC_2) U12.50(VCC_3) U13.7(VCC) U13.22(VCC_1) U13.35(VCC_2) U13.50(VCC_3) U14.7(VCC) U14.22(VCC_1) U14.35(VCC_2) U14.50(VCC_3) U15.7(VCC) U15.22(VCC_1) U15.35(VCC_2) U15.50(VCC_3) U16.7(VCC) U16.22(VCC_1) U16.35(VCC_2) U16.50(VCC_3) U17.7(VCC) U17.22(VCC_1) U17.35(VCC_2) U17.50(VCC_3) U18.7(VCC) U18.22(VCC_1) U18.35(VCC_2) U18.50(VCC_3) U19.7(VCC) U19.22(VCC_1) U19.35(VCC_2) U19.50(VCC_3) U20.7(VCC) U20.22(VCC_1) U20.35(VCC_2) U20.50(VCC_3) U21.7(VCC) U21.22(VCC_1) U21.35(VCC_2) U21.50(VCC_3) U22.7(VCC) U22.22(VCC_1) U22.35(VCC_2) U22.50(VCC_3) U23.7(VCC) U23.22(VCC_1) U23.35(VCC_2) U23.50(VCC_3) U24.7(VCC) U24.22(VCC_1) U24.35(VCC_2) U24.50(VCC_3) U25.7(VCC) U25.22(VCC_1) U25.35(VCC_2) U25.50(VCC_3) U26.7(VCC) U26.22(VCC_1) U26.35(VCC_2) U26.50(VCC_3) U27.7(VCC) U27.22(VCC_1) U27.35(VCC_2) U27.50(VCC_3) U28.7(VCC) U28.22(VCC_1) U28.35(VCC_2) U28.50(VCC_3) U29.7(VCC) U29.22(VCC_1) U29.35(VCC_2) U29.50(VCC_3) U30.7(VCC) U30.22(VCC_1) U30.35(VCC_2) U30.50(VCC_3) U31.7(VCC) U31.22(VCC_1) U31.35(VCC_2) U31.50(VCC_3)
BUFFER_A0: U2.2(1Y1) U9.55(D1) U11.55(D1) U13.55(D1)
BUFFER_A1: U2.3(1Y2) U9.54(D2) U11.54(D2) U13.54(D2)
BUFFER_A2: U2.5(1Y3) U9.52(D3) U11.52(D3) U13.52(D3) U24.33(D18) U25.52(D3)
BUFFER_A3: U2.6(1Y4) U9.51(D4) U11.51(D4) U13.51(D4) U24.34(D17) U25.51(D4)
BUFFER_A4: U2.8(1Y5) U9.49(D5) U11.49(D5) U13.49(D5) U24.36(D16) U25.49(D5)
BUFFER_A5: U2.9(1Y6) U9.48(D6) U11.48(D6) U13.48(D6) U24.37(D15) U25.48(D6)
BUFFER_A6: U2.10(1Y7) U9.47(D7) U11.47(D7) U13.47(D7) U24.38(D14) U25.47(D7)
BUFFER_A7: U2.12(1Y8) U9.45(D8) U11.45(D8) U13.45(D8) U24.40(D13) U25.45(D8)
BUFFER_A8: U2.13(1Y9) U9.44(D9) U11.44(D9) U13.44(D9) U24.41(D12) U25.44(D9)
BUFFER_A9: U2.14(1Y10) U9.43(D10) U11.43(D10) U13.43(D10) U24.42(D11) U25.43(D10)
BUFFER_A10: U2.15(2Y1) U9.42(D11) U11.42(D11) U13.42(D11) U24.43(D10) U25.42(D11)
BUFFER_A11: U2.16(2Y2) U9.41(D12) U11.41(D12) U13.41(D12) U24.44(D9) U25.41(D12)
BUFFER_A12: U2.17(2Y3) U9.40(D13) U11.40(D13) U13.40(D13) U24.45(D8) U25.40(D13)
BUFFER_A13: U2.19(2Y4) U9.38(D14) U11.38(D14) U13.38(D14) U24.47(D7) U25.38(D14)
BUFFER_A14: U2.20(2Y5) U9.37(D15) U11.37(D15) U13.37(D15) U24.48(D6) U25.37(D15)
BUFFER_A15: U2.21(2Y6) U9.36(D16) U11.36(D16) U13.36(D16) U24.49(D5) U25.36(D16)
BUFFER_A16: U2.23(2Y7) U9.34(D17) U11.34(D17) U13.34(D17) U24.51(D4) U25.34(D17)
BUFFER_A17: U2.24(2Y8) U9.33(D18) U11.33(D18) U13.33(D18) U24.52(D3) U25.33(D18)
BUFFER_A18: U2.26(2Y9) U9.31(D19) U11.31(D19) U13.31(D19) U24.54(D2) U25.31(D19)
BUFFER_A19: U2.27(2Y10) U9.30(D20) U11.30(D20) U13.30(D20) U24.55(D1) U25.30(D20)
BUFFER_A20: U1.2(1Y1) U8.55(D1) U10.55(D1) U12.55(D1) U20.30(D20) U21.55(D1)
BUFFER_A21: U1.3(1Y2) U8.54(D2) U10.54(D2) U12.54(D2) U20.31(D19) U21.54(D2)
BUFFER_A22: U1.5(1Y3) U8.52(D3) U10.52(D3) U12.52(D3) U20.33(D18) U21.52(D3)
BUFFER_A23: U1.6(1Y4) U8.51(D4) U10.51(D4) U12.51(D4) U20.34(D17) U21.51(D4)
BUFFER_A24: U1.8(1Y5) U8.49(D5) U10.49(D5) U12.49(D5) U20.36(D16) U21.49(D5)
BUFFER_A25: U1.9(1Y6) U8.48(D6) U10.48(D6) U12.48(D6) U20.37(D15) U21.48(D6)
BUFFER_A26: U1.10(1Y7) U8.47(D7) U10.47(D7) U12.47(D7) U20.38(D14) U21.47(D7)
BUFFER_A27: U1.12(1Y8) U8.45(D8) U10.45(D8) U12.45(D8) U20.40(D13) U21.45(D8)
BUFFER_A28: U1.13(1Y9) U8.44(D9) U10.44(D9) U12.44(D9) U20.41(D12) U21.44(D9)
BUFFER_A29: U1.14(1Y10) U8.43(D10) U10.43(D10) U12.43(D10) U20.42(D11) U21.43(D10)
BUFFER_A30: U1.15(2Y1) U8.42(D11) U10.42(D11) U12.42(D11) U20.43(D10) U21.42(D11)
BUFFER_A31: U1.16(2Y2) U8.41(D12) U10.41(D12) U12.41(D12) U20.44(D9) U21.41(D12)
BUFFER_A32: U1.17(2Y3) U8.40(D13) U10.40(D13) U12.40(D13) U20.45(D8) U21.40(D13)
BUFFER_A33: U1.19(2Y4) U8.38(D14) U10.38(D14) U12.38(D14) U20.47(D7) U21.38(D14)
BUFFER_A34: U1.20(2Y5) U8.37(D15) U10.37(D15) U12.37(D15) U20.48(D6) U21.37(D15)
BUFFER_A35: U1.21(2Y6) U8.36(D16) U10.36(D16) U12.36(D16) U20.49(D5) U21.36(D16)
BUFFER_A36: U1.23(2Y7) U8.34(D17) U10.34(D17) U12.34(D17) U20.51(D4) U21.34(D17)
BUFFER_A37: U1.24(2Y8) U8.33(D18) U10.33(D18) U12.33(D18) U20.52(D3) U21.33(D18)
BUFFER_A38: U1.26(2Y9) U8.31(D19) U10.31(D19) U12.31(D19) U20.54(D2) U21.31(D19)
BUFFER_A39: U1.27(2Y10) U8.30(D20) U10.30(D20) U12.30(D20) U20.55(D1) U21.30(D20)
BUFFER_B0: U4.27(2Y10) U15.30(D20) U17.30(D20) U19.30(D20)
BUFFER_B1: U4.26(2Y9) U15.31(D19) U17.31(D19) U19.31(D19)
BUFFER_B2: U4.24(2Y8) U15.33(D18) U17.33(D18) U19.33(D18)
BUFFER_B3: U4.23(2Y7) U15.34(D17) U17.34(D17) U19.34(D17)
BUFFER_B4: U4.21(2Y6) U15.36(D16) U17.36(D16) U19.36(D16)
BUFFER_B5: U4.20(2Y5) U15.37(D15) U17.37(D15) U19.37(D15)
BUFFER_B6: U4.19(2Y4) U15.38(D14) U17.38(D14) U19.38(D14)
BUFFER_B7: U4.17(2Y3) U15.40(D13) U17.40(D13) U19.40(D13)
BUFFER_B8: U4.16(2Y2) U15.41(D12) U17.41(D12) U19.41(D12)
BUFFER_B9: U4.15(2Y1) U15.42(D11) U17.42(D11) U19.42(D11)
BUFFER_B10: U4.14(1Y10) U15.43(D10) U17.43(D10) U19.43(D10)
BUFFER_B11: U4.13(1Y9) U15.44(D9) U17.44(D9) U19.44(D9)
BUFFER_B12: U4.12(1Y8) U15.45(D8) U17.45(D8) U19.45(D8)
BUFFER_B13: U4.10(1Y7) U15.47(D7) U17.47(D7) U19.47(D7)
BUFFER_B14: U4.9(1Y6) U15.48(D6) U17.48(D6) U19.48(D6)
BUFFER_B15: U4.8(1Y5) U15.49(D5) U17.49(D5) U19.49(D5)
BUFFER_B16: U4.6(1Y4) U15.51(D4) U17.51(D4) U19.51(D4)
BUFFER_B17: U4.5(1Y3) U15.52(D3) U17.52(D3) U19.52(D3)
BUFFER_B18: U4.3(1Y2) U15.54(D2) U17.54(D2) U19.54(D2)
BUFFER_B19: U4.2(1Y1) U15.55(D1) U17.55(D1) U19.55(D1)
BUFFER_B20: U3.27(2Y10) U14.30(D20) U16.30(D20) U18.30(D20)
BUFFER_B21: U3.26(2Y9) U14.31(D19) U16.31(D19) U18.31(D19)
BUFFER_B22: U3.24(2Y8) U14.33(D18) U16.33(D18) U18.33(D18)
BUFFER_B23: U3.23(2Y7) U14.34(D17) U16.34(D17) U18.34(D17)
BUFFER_B24: U3.21(2Y6) U14.36(D16) U16.36(D16) U18.36(D16)
BUFFER_B25: U3.20(2Y5) U14.37(D15) U16.37(D15) U18.37(D15)
BUFFER_B26: U3.19(2Y4) U14.38(D14) U16.38(D14) U18.38(D14)
BUFFER_B27: U3.17(2Y3) U14.40(D13) U16.40(D13) U18.40(D13)
BUFFER_B28: U3.16(2Y2) U14.41(D12) U16.41(D12) U18.41(D12)
BUFFER_B29: U3.15(2Y1) U14.42(D11) U16.42(D11) U18.42(D11)
BUFFER_B30: U3.14(1Y10) U14.43(D10) U16.43(D10) U18.43(D10)
BUFFER_B31: U3.13(1Y9) U14.44(D9) U16.44(D9) U18.44(D9)
BUFFER_B32: U3.12(1Y8) U14.45(D8) U16.45(D8) U18.45(D8)
BUFFER_B33: U3.10(1Y7) U14.47(D7) U16.47(D7) U18.47(D7)
BUFFER_B34: U3.9(1Y6) U14.48(D6) U16.48(D6) U18.48(D6)
BUFFER_B35: U3.8(1Y5) U14.49(D5) U16.49(D5) U18.49(D5)
BUFFER_B36: U3.6(1Y4) U14.51(D4) U16.51(D4) U18.51(D4)
BUFFER_B37: U3.5(1Y3) U14.52(D3) U16.52(D3) U18.52(D3)
BUFFER_B38: U3.3(1Y2) U14.54(D2) U16.54(D2) U18.54(D2)
BUFFER_B39: U3.2(1Y1) U14.55(D1) U16.55(D1) U18.55(D1)
BUFFER_C0: U6.2(1Y1) U27.55(D1) U29.55(D1) U31.55(D1)
BUFFER_C1: U6.3(1Y2) U23.54(D2) U27.54(D2) U29.54(D2) U31.54(D2)
BUFFER_C2: U6.5(1Y3) U23.52(D3) U27.52(D3) U29.52(D3) U31.52(D3)
BUFFER_C3: U6.6(1Y4) U23.51(D4) U27.51(D4) U29.51(D4) U31.51(D4)
BUFFER_C4: U6.8(1Y5) U23.49(D5) U27.49(D5) U29.49(D5) U31.49(D5)
BUFFER_C5: U6.9(1Y6) U23.48(D6) U27.48(D6) U29.48(D6) U31.48(D6)
BUFFER_C6: U6.10(1Y7) U23.47(D7) U27.47(D7) U29.47(D7) U31.47(D7)
BUFFER_C7: U6.12(1Y8) U23.45(D8) U27.45(D8) U29.45(D8) U31.45(D8)
BUFFER_C8: U6.13(1Y9) U23.44(D9) U27.44(D9) U29.44(D9) U31.44(D9)
BUFFER_C9: U6.14(1Y10) U23.43(D10) U27.43(D10) U29.43(D10) U31.43(D10)
BUFFER_C10: U6.15(2Y1) U23.42(D11) U27.42(D11) U29.42(D11) U31.42(D11)
BUFFER_C11: U6.16(2Y2) U23.41(D12) U27.41(D12) U29.41(D12) U31.41(D12)
BUFFER_C12: U6.17(2Y3) U23.40(D13) U27.40(D13) U29.40(D13) U31.40(D13)
BUFFER_C13: U6.19(2Y4) U23.38(D14) U27.38(D14) U29.38(D14) U31.38(D14)
BUFFER_C14: U6.20(2Y5) U23.37(D15) U27.37(D15) U29.37(D15) U31.37(D15)
BUFFER_C15: U6.21(2Y6) U23.36(D16) U27.36(D16) U29.36(D16) U31.36(D16)
BUFFER_C16: U6.23(2Y7) U23.34(D17) U27.34(D17) U29.34(D17) U31.34(D17)
BUFFER_C17: U6.24(2Y8) U23.33(D18) U27.33(D18) U29.33(D18) U31.33(D18)
BUFFER_C18: U6.26(2Y9) U23.31(D19) U27.31(D19) U29.31(D19) U31.31(D19)
BUFFER_C19: U6.27(2Y10) U23.30(D20) U27.30(D20) U29.30(D20) U31.30(D20)
BUFFER_C20: U5.2(1Y1) U22.55(D1) U26.55(D1) U28.55(D1) U30.55(D1)
BUFFER_C21: U5.3(1Y2) U22.54(D2) U26.54(D2) U28.54(D2) U30.54(D2)
BUFFER_C22: U5.5(1Y3) U22.52(D3) U26.52(D3) U28.52(D3) U30.52(D3)
BUFFER_C23: U5.6(1Y4) U22.51(D4) U26.51(D4) U28.51(D4) U30.51(D4)
BUFFER_C24: U5.8(1Y5) U22.49(D5) U26.49(D5) U28.49(D5) U30.49(D5)
BUFFER_C25: U5.9(1Y6) U22.48(D6) U26.48(D6) U28.48(D6) U30.48(D6)
BUFFER_C26: U5.10(1Y7) U22.47(D7) U26.47(D7) U28.47(D7) U30.47(D7)
BUFFER_C27: U5.12(1Y8) U22.45(D8) U26.45(D8) U28.45(D8) U30.45(D8)
BUFFER_C28: U5.13(1Y9) U22.44(D9) U26.44(D9) U28.44(D9) U30.44(D9)
BUFFER_C29: U5.14(1Y10) U22.43(D10) U26.43(D10) U28.43(D10) U30.43(D10)
BUFFER_C30: U5.15(2Y1) U22.42(D11) U26.42(D11) U28.42(D11) U30.42(D11)
BUFFER_C31: U5.16(2Y2) U22.41(D12) U26.41(D12) U28.41(D12) U30.41(D12)
BUFFER_C32: U5.17(2Y3) U22.40(D13) U26.40(D13) U28.40(D13) U30.40(D13)
BUFFER_C33: U5.19(2Y4) U22.38(D14) U26.38(D14) U28.38(D14) U30.38(D14)
BUFFER_C34: U5.20(2Y5) U22.37(D15) U26.37(D15) U28.37(D15) U30.37(D15)
BUFFER_C35: U5.21(2Y6) U22.36(D16) U26.36(D16) U28.36(D16) U30.36(D16)
BUFFER_C36: U5.23(2Y7) U22.34(D17) U26.34(D17) U28.34(D17) U30.34(D17)
BUFFER_C37: U5.24(2Y8) U22.33(D18) U26.33(D18) U28.33(D18) U30.33(D18)
BUFFER_C38: U5.26(2Y9) U22.31(D19) U26.31(D19) U28.31(D19) U30.31(D19)
BUFFER_C39: U5.27(2Y10) U26.30(D20) U28.30(D20) U30.30(D20)
DATA_A0: J2.14(DIP_14) U2.55(1A1)
DATA_A1: J2.15(DIP_15) U2.54(1A2)
DATA_A2: J2.16(DIP_16) U2.52(1A3)
DATA_A3: J2.17(DIP_17) U2.51(1A4)
DATA_A4: J2.18(DIP_18) U2.49(1A5)
DATA_A5: J2.19(DIP_19) U2.48(1A6)
DATA_A6: J2.20(DIP_20) U2.47(1A7)
DATA_A7: J1.41(DIP_41) U2.45(1A8)
DATA_A8: J1.42(DIP_42) U2.44(1A9)
DATA_A9: J1.43(DIP_43) U2.43(1A10)
DATA_A10: J1.44(DIP_44) U2.42(2A1)
DATA_A11: J1.45(DIP_45) U2.41(2A2)
DATA_A12: J1.46(DIP_46) U2.40(2A3)
DATA_A13: J1.47(DIP_47) U2.38(2A4)
DATA_A14: J1.48(DIP_48) U2.37(2A5)
DATA_A15: J1.49(DIP_49) U2.36(2A6)
DATA_A16: J1.50(DIP_50) U2.34(2A7)
DATA_A17: J1.51(DIP_51) U2.33(2A8)
DATA_A18: J1.52(DIP_52) U2.31(2A9)
DATA_A19: J1.53(DIP_53) U2.30(2A10)
DATA_A20: J1.54(DIP_54) U1.55(1A1)
DATA_A21: J1.55(DIP_55) U1.54(1A2)
DATA_A22: J1.56(DIP_56) U1.52(1A3)
DATA_A23: J1.57(DIP_57) U1.51(1A4)
DATA_A24: J1.58(DIP_58) U1.49(1A5)
DATA_A25: J1.59(DIP_59) U1.48(1A6)
DATA_A26: J1.60(DIP_60) U1.47(1A7)
DATA_A27: J1.61(DIP_61) U1.45(1A8)
DATA_A28: J1.62(DIP_62) U1.44(1A9)
DATA_A29: J1.63(DIP_63) U1.43(1A10)
DATA_A30: J1.64(DIP_64) U1.42(2A1)
DATA_A31: J1.65(DIP_65) U1.41(2A2)
DATA_A32: J1.66(DIP_66) U1.40(2A3)
DATA_A33: J1.67(DIP_67) U1.38(2A4)
DATA_A34: J1.68(DIP_68) U1.37(2A5)
DATA_A35: J1.69(DIP_69) U1.36(2A6)
DATA_A36: J1.70(DIP_70) U1.34(2A7)
DATA_A37: J1.71(DIP_71) U1.33(2A8)
DATA_A38: J1.72(DIP_72) U1.31(2A9)
DATA_A39: J1.73(DIP_73) U1.30(2A10)
DATA_A40: J1.74(DIP_74) U12.56(CLK) U13.56(CLK)
DATA_A41: J1.75(DIP_75) U10.56(CLK) U11.56(CLK)
DATA_A42: J1.76(DIP_76) U8.56(CLK) U9.56(CLK)
DATA_B0: J2.7(DIP_7) U4.30(2A10)
DATA_B1: J2.6(DIP_6) U4.31(2A9)
DATA_B2: J2.5(DIP_5) U4.33(2A8)
DATA_B3: J2.4(DIP_4) U4.34(2A7)
DATA_B4: J2.3(DIP_3) U4.36(2A6)
DATA_B5: J2.2(DIP_2) U4.37(2A5)
DATA_B6: J2.1(DIP_1) U4.38(2A4)
DATA_B7: J1.40(DIP_40) U4.40(2A3)
DATA_B8: J1.39(DIP_39) U4.41(2A2)
DATA_B9: J1.38(DIP_38) U4.42(2A1)
DATA_B10: J1.37(DIP_37) U4.43(1A10)
DATA_B11: J1.36(DIP_36) U4.44(1A9)
DATA_B12: J1.35(DIP_35) U4.45(1A8)
DATA_B13: J1.34(DIP_34) U4.47(1A7)
DATA_B14: J1.33(DIP_33) U4.48(1A6)
DATA_B15: J1.32(DIP_32) U4.49(1A5)
DATA_B16: J1.31(DIP_31) U4.51(1A4)
DATA_B17: J1.30(DIP_30) U4.52(1A3)
DATA_B18: J1.29(DIP_29) U4.54(1A2)
DATA_B19: J1.28(DIP_28) U4.55(1A1)
DATA_B20: J1.27(DIP_27) U3.30(2A10)
DATA_B21: J1.26(DIP_26) U3.31(2A9)
DATA_B22: J1.25(DIP_25) U3.33(2A8)
DATA_B23: J1.24(DIP_24) U3.34(2A7)
DATA_B24: J1.23(DIP_23) U3.36(2A6)
DATA_B25: J1.22(DIP_22) U3.37(2A5)
DATA_B26: J1.21(DIP_21) U3.38(2A4)
DATA_B27: J1.20(DIP_20) U3.40(2A3)
DATA_B28: J1.19(DIP_19) U3.41(2A2)
DATA_B29: J1.18(DIP_18) U3.42(2A1)
DATA_B30: J1.17(DIP_17) U3.43(1A10)
DATA_B31: J1.16(DIP_16) U3.44(1A9)
DATA_B32: J1.15(DIP_15) U3.45(1A8)
DATA_B33: J1.14(DIP_14) U3.47(1A7)
DATA_B34: J1.13(DIP_13) U3.48(1A6)
DATA_B35: J1.12(DIP_12) U3.49(1A5)
DATA_B36: J1.11(DIP_11) U3.51(1A4)
DATA_B37: J1.10(DIP_10) U3.52(1A3)
DATA_B38: J1.9(DIP_9) U3.54(1A2)
DATA_B39: J1.8(DIP_8) U3.55(1A1)
DATA_B40: J1.7(DIP_7) U18.56(CLK) U19.56(CLK)
DATA_B41: J1.6(DIP_6) U16.56(CLK) U17.56(CLK)
DATA_B42: J1.5(DIP_5) U14.56(CLK) U15.56(CLK)
DATA_C0: J5.15(DIP_15) U6.55(1A1)
DATA_C1: J5.16(DIP_16) U6.54(1A2)
DATA_C2: J5.17(DIP_17) U6.52(1A3)
DATA_C3: J5.18(DIP_18) U6.51(1A4)
DATA_C4: J5.19(DIP_19) U6.49(1A5)
DATA_C5: J5.20(DIP_20) U6.48(1A6)
DATA_C6: J4.41(DIP_41) U6.47(1A7)
DATA_C7: J4.42(DIP_42) U6.45(1A8)
DATA_C8: J4.43(DIP_43) U6.44(1A9)
DATA_C9: J4.44(DIP_44) U6.43(1A10)
DATA_C10: J4.45(DIP_45) U6.42(2A1)
DATA_C11: J4.46(DIP_46) U6.41(2A2)
DATA_C12: J4.47(DIP_47) U6.40(2A3)
DATA_C13: J4.48(DIP_48) U6.38(2A4)
DATA_C14: J4.49(DIP_49) U6.37(2A5)
DATA_C15: J4.50(DIP_50) U6.36(2A6)
DATA_C16: J4.51(DIP_51) U6.34(2A7)
DATA_C17: J4.52(DIP_52) U6.33(2A8)
DATA_C18: J4.53(DIP_53) U6.31(2A9)
DATA_C19: J4.54(DIP_54) U6.30(2A10)
DATA_C20: J4.55(DIP_55) U5.55(1A1)
DATA_C21: J4.56(DIP_56) U5.54(1A2)
DATA_C22: J4.57(DIP_57) U5.52(1A3)
DATA_C23: J4.58(DIP_58) U5.51(1A4)
DATA_C24: J4.59(DIP_59) U5.49(1A5)
DATA_C25: J4.60(DIP_60) U5.48(1A6)
DATA_C26: J4.61(DIP_61) U5.47(1A7)
DATA_C27: J4.62(DIP_62) U5.45(1A8)
DATA_C28: J4.63(DIP_63) U5.44(1A9)
DATA_C29: J4.64(DIP_64) U5.43(1A10)
DATA_C30: J4.65(DIP_65) U5.42(2A1)
DATA_C31: J4.66(DIP_66) U5.41(2A2)
DATA_C32: J4.67(DIP_67) U5.40(2A3)
DATA_C33: J4.68(DIP_68) U5.38(2A4)
DATA_C34: J4.69(DIP_69) U5.37(2A5)
DATA_C35: J4.70(DIP_70) U5.36(2A6)
DATA_C36: J4.71(DIP_71) U5.34(2A7)
DATA_C37: J4.72(DIP_72) U5.33(2A8)
DATA_C38: J4.73(DIP_73) U5.31(2A9)
DATA_C39: J4.74(DIP_74) U5.30(2A10)
DATA_C40: J4.75(DIP_75) J9.41(DIP_41)
DATA_C41: J4.76(DIP_76) J9.42(DIP_42)
DATA_C42: J4.77(DIP_77)
DATA_D0: J5.6(DIP_6) U20.56(CLK) U24.56(CLK)
DATA_D1: J5.5(DIP_5) U23.56(CLK)
DATA_D2: J5.4(DIP_4) U30.56(CLK) U31.56(CLK)
DATA_D3: J5.3(DIP_3)
DATA_D4: J5.2(DIP_2)
DATA_D5: J5.1(DIP_1)
DATA_D6: J4.40(DIP_40)
DATA_D7: J4.39(DIP_39)
DATA_D8: J4.38(DIP_38)
DATA_D9: J4.37(DIP_37)
DATA_D10: J4.36(DIP_36)
DATA_D11: J4.35(DIP_35)
DATA_D12: J4.34(DIP_34)
DATA_D13: J4.33(DIP_33)
DATA_D14: J4.32(DIP_32)
DATA_D15: J4.31(DIP_31)
DATA_D16: J4.30(DIP_30)
DATA_D17: J4.29(DIP_29)
DATA_D18: J4.28(DIP_28)
DATA_D19: J4.27(DIP_27)
DATA_D20: J4.26(DIP_26)
DATA_D21: J4.25(DIP_25)
DATA_D22: J4.24(DIP_24)
DATA_D23: J4.23(DIP_23)
DATA_D24: J4.22(DIP_22)
DATA_D25: J4.21(DIP_21)
DATA_D26: J4.20(DIP_20)
DATA_D27: J4.19(DIP_19)
DATA_D28: J4.18(DIP_18)
DATA_D29: J4.17(DIP_17)
DATA_D30: J4.16(DIP_16)
DATA_D31: J4.15(DIP_15)
DATA_D32: J4.14(DIP_14)
DATA_D33: J4.13(DIP_13)
DATA_D34: J4.12(DIP_12)
DATA_D35: J4.11(DIP_11)
DATA_D36: J4.10(DIP_10)
DATA_D37: J4.9(DIP_9)
DATA_D38: J4.8(DIP_8) U28.56(CLK) U29.56(CLK)
DATA_D39: J4.7(DIP_7) U26.56(CLK) U27.56(CLK)
DATA_D40: J4.6(DIP_6) U22.56(CLK)
DATA_D41: J4.5(DIP_5) U21.56(CLK) U25.56(CLK)
DATA_D42: J4.4(DIP_4)
DC: C28.1 J3.1(DIP_1) J3.2(DIP_2) J3.3(DIP_3) J3.4(DIP_4) J3.5(DIP_5) J3.6(DIP_6) J3.7(DIP_7) J3.8(DIP_8) J3.9(DIP_9) J3.10(DIP_10) R27.1 U7.1(VIN) U7.2(VIN_1)
HEADER_A0: J8.40(DIP_40) U13.2(Q1)
HEADER_A1: J8.39(DIP_39) U13.3(Q2)
HEADER_A2: J8.38(DIP_38) U13.5(Q3)
HEADER_A3: J8.37(DIP_37) U13.6(Q4)
HEADER_A4: J8.36(DIP_36) U13.8(Q5)
HEADER_A5: J8.35(DIP_35) U13.9(Q6)
HEADER_A6: J8.34(DIP_34) U13.10(Q7)
HEADER_A7: J8.33(DIP_33) U13.12(Q8)
HEADER_A8: J8.32(DIP_32) U13.13(Q9)
HEADER_A9: J8.31(DIP_31) U13.14(Q10)
HEADER_A10: J8.30(DIP_30) U13.15(Q11)
HEADER_A11: J8.29(DIP_29) U13.16(Q12)
HEADER_A12: J8.28(DIP_28) U13.17(Q13)
HEADER_A13: J8.27(DIP_27) U13.19(Q14)
HEADER_A14: J8.26(DIP_26) U13.20(Q15)
HEADER_A15: J8.25(DIP_25) U13.21(Q16)
HEADER_A16: J8.24(DIP_24) U13.23(Q17)
HEADER_A17: J8.23(DIP_23) U13.24(Q18)
HEADER_A18: J8.22(DIP_22) U13.26(Q19)
HEADER_A19: J8.21(DIP_21) U13.27(Q20)
HEADER_A20: J8.20(DIP_20) U12.2(Q1)
HEADER_A21: J8.19(DIP_19) U12.3(Q2)
HEADER_A22: J8.18(DIP_18) U12.5(Q3)
HEADER_A23: J8.17(DIP_17) U12.6(Q4)
HEADER_A24: J8.16(DIP_16) U12.8(Q5)
HEADER_A25: J8.15(DIP_15) U12.9(Q6)
HEADER_A26: J8.14(DIP_14) U12.10(Q7)
HEADER_A27: J8.13(DIP_13) U12.12(Q8)
HEADER_A28: J8.12(DIP_12) U12.13(Q9)
HEADER_A29: J8.11(DIP_11) U12.14(Q10)
HEADER_A30: J8.10(DIP_10) U12.15(Q11)
HEADER_A31: J8.9(DIP_9) U12.16(Q12)
HEADER_A32: J8.8(DIP_8) U12.17(Q13)
HEADER_A33: J8.7(DIP_7) U12.19(Q14)
HEADER_A34: J8.6(DIP_6) U12.20(Q15)
HEADER_A35: J8.5(DIP_5) U12.21(Q16)
HEADER_A36: J8.4(DIP_4) U12.23(Q17)
HEADER_A37: J8.3(DIP_3) U12.24(Q18)
HEADER_A38: J8.2(DIP_2) U12.26(Q19)
HEADER_A39: J8.1(DIP_1) U12.27(Q20)
HEADER_A40: J7.40(DIP_40) U11.2(Q1)
HEADER_A41: J7.39(DIP_39) U11.3(Q2)
HEADER_A42: J7.38(DIP_38) U11.5(Q3)
HEADER_A43: J7.37(DIP_37) U11.6(Q4)
HEADER_A44: J7.36(DIP_36) U11.8(Q5)
HEADER_A45: J7.35(DIP_35) U11.9(Q6)
HEADER_A46: J7.34(DIP_34) U11.10(Q7)
HEADER_A47: J7.33(DIP_33) U11.12(Q8)
HEADER_A48: J7.32(DIP_32) U11.13(Q9)
HEADER_A49: J7.31(DIP_31) U11.14(Q10)
HEADER_A50: J7.30(DIP_30) U11.15(Q11)
HEADER_A51: J7.29(DIP_29) U11.16(Q12)
HEADER_A52: J7.28(DIP_28) U11.17(Q13)
HEADER_A53: J7.27(DIP_27) U11.19(Q14)
HEADER_A54: J7.26(DIP_26) U11.20(Q15)
HEADER_A55: J7.25(DIP_25) U11.21(Q16)
HEADER_A56: J7.24(DIP_24) U11.23(Q17)
HEADER_A57: J7.23(DIP_23) U11.24(Q18)
HEADER_A58: J7.22(DIP_22) U11.26(Q19)
HEADER_A59: J7.21(DIP_21) U11.27(Q20)
HEADER_A60: J7.20(DIP_20) U10.2(Q1)
HEADER_A61: J7.19(DIP_19) U10.3(Q2)
HEADER_A62: J7.18(DIP_18) U10.5(Q3)
HEADER_A63: J7.17(DIP_17) U10.6(Q4)
HEADER_A64: J7.16(DIP_16) U10.8(Q5)
HEADER_A65: J7.15(DIP_15) U10.9(Q6)
HEADER_A66: J7.14(DIP_14) U10.10(Q7)
HEADER_A67: J7.13(DIP_13) U10.12(Q8)
HEADER_A68: J7.12(DIP_12) U10.13(Q9)
HEADER_A69: J7.11(DIP_11) U10.14(Q10)
HEADER_A70: J7.10(DIP_10) U10.15(Q11)
HEADER_A71: J7.9(DIP_9) U10.16(Q12)
HEADER_A72: J7.8(DIP_8) U10.17(Q13)
HEADER_A73: J7.7(DIP_7) U10.19(Q14)
HEADER_A74: J7.6(DIP_6) U10.20(Q15)
HEADER_A75: J7.5(DIP_5) U10.21(Q16)
HEADER_A76: J7.4(DIP_4) U10.23(Q17)
HEADER_A77: J7.3(DIP_3) U10.24(Q18)
HEADER_A78: J7.2(DIP_2) U10.26(Q19)
HEADER_A79: J7.1(DIP_1) U10.27(Q20)
HEADER_A80: J6.40(DIP_40) U9.2(Q1)
HEADER_A81: J6.39(DIP_39) U9.3(Q2)
HEADER_A82: J6.38(DIP_38) U9.5(Q3)
HEADER_A83: J6.37(DIP_37) U9.6(Q4)
HEADER_A84: J6.36(DIP_36) U9.8(Q5)
HEADER_A85: J6.35(DIP_35) U9.9(Q6)
HEADER_A86: J6.34(DIP_34) U9.10(Q7)
HEADER_A87: J6.33(DIP_33) U9.12(Q8)
HEADER_A88: J6.32(DIP_32) U9.13(Q9)
HEADER_A89: J6.31(DIP_31) U9.14(Q10)
HEADER_A90: J6.30(DIP_30) U9.15(Q11)
HEADER_A91: J6.29(DIP_29) U9.16(Q12)
HEADER_A92: J6.28(DIP_28) U9.17(Q13)
HEADER_A93: J6.27(DIP_27) U9.19(Q14)
HEADER_A94: J6.26(DIP_26) U9.20(Q15)
HEADER_A95: J6.25(DIP_25) U9.21(Q16)
HEADER_A96: J6.24(DIP_24) U9.23(Q17)
HEADER_A97: J6.23(DIP_23) U9.24(Q18)
HEADER_A98: J6.22(DIP_22) U9.26(Q19)
HEADER_A99: J6.21(DIP_21) U9.27(Q20)
HEADER_A100: J6.20(DIP_20) U8.2(Q1)
HEADER_A101: J6.19(DIP_19) U8.3(Q2)
HEADER_A102: J6.18(DIP_18) U8.5(Q3)
HEADER_A103: J6.17(DIP_17) U8.6(Q4)
HEADER_A104: J6.16(DIP_16) U8.8(Q5)
HEADER_A105: J6.15(DIP_15) U8.9(Q6)
HEADER_A106: J6.14(DIP_14) U8.10(Q7)
HEADER_A107: J6.13(DIP_13) U8.12(Q8)
HEADER_A108: J6.12(DIP_12) U8.13(Q9)
HEADER_A109: J6.11(DIP_11) U8.14(Q10)
HEADER_A110: J6.10(DIP_10) U8.15(Q11)
HEADER_A111: J6.9(DIP_9) U8.16(Q12)
HEADER_A112: J6.8(DIP_8) U8.17(Q13)
HEADER_A113: J6.7(DIP_7) U8.19(Q14)
HEADER_A114: J6.6(DIP_6) U8.20(Q15)
HEADER_A115: J6.5(DIP_5) U8.21(Q16)
HEADER_A116: J6.4(DIP_4) U8.23(Q17)
HEADER_A117: J6.3(DIP_3) U8.24(Q18)
HEADER_A118: J6.2(DIP_2) U8.26(Q19)
HEADER_A119: J6.1(DIP_1) U8.27(Q20)
HEADER_B0: J8.41(DIP_41) U19.27(Q20)
HEADER_B1: J8.42(DIP_42) U19.26(Q19)
HEADER_B2: J8.43(DIP_43) U19.24(Q18)
HEADER_B3: J8.44(DIP_44) U19.23(Q17)
HEADER_B4: J8.45(DIP_45) U19.21(Q16)
HEADER_B5: J8.46(DIP_46) U19.20(Q15)
HEADER_B6: J8.47(DIP_47) U19.19(Q14)
HEADER_B7: J8.48(DIP_48) U19.17(Q13)
HEADER_B8: J8.49(DIP_49) U19.16(Q12)
HEADER_B9: J8.50(DIP_50) U19.15(Q11)
HEADER_B10: J8.51(DIP_51) U19.14(Q10)
HEADER_B11: J8.52(DIP_52) U19.13(Q9)
HEADER_B12: J8.53(DIP_53) U19.12(Q8)
HEADER_B13: J8.54(DIP_54) U19.10(Q7)
HEADER_B14: J8.55(DIP_55) U19.9(Q6)
HEADER_B15: J8.56(DIP_56) U19.8(Q5)
HEADER_B16: J8.57(DIP_57) U19.6(Q4)
HEADER_B17: J8.58(DIP_58) U19.5(Q3)
HEADER_B18: J8.59(DIP_59) U19.3(Q2)
HEADER_B19: J8.60(DIP_60) U19.2(Q1)
HEADER_B20: J8.61(DIP_61) U18.27(Q20)
HEADER_B21: J8.62(DIP_62) U18.26(Q19)
HEADER_B22: J8.63(DIP_63) U18.24(Q18)
HEADER_B23: J8.64(DIP_64) U18.23(Q17)
HEADER_B24: J8.65(DIP_65) U18.21(Q16)
HEADER_B25: J8.66(DIP_66) U18.20(Q15)
HEADER_B26: J8.67(DIP_67) U18.19(Q14)
HEADER_B27: J8.68(DIP_68) U18.17(Q13)
HEADER_B28: J8.69(DIP_69) U18.16(Q12)
HEADER_B29: J8.70(DIP_70) U18.15(Q11)
HEADER_B30: J8.71(DIP_71) U18.14(Q10)
HEADER_B31: J8.72(DIP_72) U18.13(Q9)
HEADER_B32: J8.73(DIP_73) U18.12(Q8)
HEADER_B33: J8.74(DIP_74) U18.10(Q7)
HEADER_B34: J8.75(DIP_75) U18.9(Q6)
HEADER_B35: J8.76(DIP_76) U18.8(Q5)
HEADER_B36: J8.77(DIP_77) U18.6(Q4)
HEADER_B37: J8.78(DIP_78) U18.5(Q3)
HEADER_B38: J8.79(DIP_79) U18.3(Q2)
HEADER_B39: J8.80(DIP_80) U18.2(Q1)
HEADER_B40: J7.41(DIP_41) U17.27(Q20)
HEADER_B41: J7.42(DIP_42) U17.26(Q19)
HEADER_B42: J7.43(DIP_43) U17.24(Q18)
HEADER_B43: J7.44(DIP_44) U17.23(Q17)
HEADER_B44: J7.45(DIP_45) U17.21(Q16)
HEADER_B45: J7.46(DIP_46) U17.20(Q15)
HEADER_B46: J7.47(DIP_47) U17.19(Q14)
HEADER_B47: J7.48(DIP_48) U17.17(Q13)
HEADER_B48: J7.49(DIP_49) U17.16(Q12)
HEADER_B49: J7.50(DIP_50) U17.15(Q11)
HEADER_B50: J7.51(DIP_51) U17.14(Q10)
HEADER_B51: J7.52(DIP_52) U17.13(Q9)
HEADER_B52: J7.53(DIP_53) U17.12(Q8)
HEADER_B53: J7.54(DIP_54) U17.10(Q7)
HEADER_B54: J7.55(DIP_55) U17.9(Q6)
HEADER_B55: J7.56(DIP_56) U17.8(Q5)
HEADER_B56: J7.57(DIP_57) U17.6(Q4)
HEADER_B57: J7.58(DIP_58) U17.5(Q3)
HEADER_B58: J7.59(DIP_59) U17.3(Q2)
HEADER_B59: J7.60(DIP_60) U17.2(Q1)
HEADER_B60: J7.61(DIP_61) U16.27(Q20)
HEADER_B61: J7.62(DIP_62) U16.26(Q19)
HEADER_B62: J7.63(DIP_63) U16.24(Q18)
HEADER_B63: J7.64(DIP_64) U16.23(Q17)
HEADER_B64: J7.65(DIP_65) U16.21(Q16)
HEADER_B65: J7.66(DIP_66) U16.20(Q15)
HEADER_B66: J7.67(DIP_67) U16.19(Q14)
HEADER_B67: J7.68(DIP_68) U16.17(Q13)
HEADER_B68: J7.69(DIP_69) U16.16(Q12)
HEADER_B69: J7.70(DIP_70) U16.15(Q11)
HEADER_B70: J7.71(DIP_71) U16.14(Q10)
HEADER_B71: J7.72(DIP_72) U16.13(Q9)
HEADER_B72: J7.73(DIP_73) U16.12(Q8)
HEADER_B73: J7.74(DIP_74) U16.10(Q7)
HEADER_B74: J7.75(DIP_75) U16.9(Q6)
HEADER_B75: J7.76(DIP_76) U16.8(Q5)
HEADER_B76: J7.77(DIP_77) U16.6(Q4)
HEADER_B77: J7.78(DIP_78) U16.5(Q3)
HEADER_B78: J7.79(DIP_79) U16.3(Q2)
HEADER_B79: J7.80(DIP_80) U16.2(Q1)
HEADER_B80: J6.41(DIP_41) U15.27(Q20)
HEADER_B81: J6.42(DIP_42) U15.26(Q19)
HEADER_B82: J6.43(DIP_43) U15.24(Q18)
HEADER_B83: J6.44(DIP_44) U15.23(Q17)
HEADER_B84: J6.45(DIP_45) U15.21(Q16)
HEADER_B85: J6.46(DIP_46) U15.20(Q15)
HEADER_B86: J6.47(DIP_47) U15.19(Q14)
HEADER_B87: J6.48(DIP_48) U15.17(Q13)
HEADER_B88: J6.49(DIP_49) U15.16(Q12)
HEADER_B89: J6.50(DIP_50) U15.15(Q11)
HEADER_B90: J6.51(DIP_51) U15.14(Q10)
HEADER_B91: J6.52(DIP_52) U15.13(Q9)
HEADER_B92: J6.53(DIP_53) U15.12(Q8)
HEADER_B93: J6.54(DIP_54) U15.10(Q7)
HEADER_B94: J6.55(DIP_55) U15.9(Q6)
HEADER_B95: J6.56(DIP_56) U15.8(Q5)
HEADER_B96: J6.57(DIP_57) U15.6(Q4)
HEADER_B97: J6.58(DIP_58) U15.5(Q3)
HEADER_B98: J6.59(DIP_59) U15.3(Q2)
HEADER_B99: J6.60(DIP_60) U15.2(Q1)
HEADER_B100: J6.61(DIP_61) U14.27(Q20)
HEADER_B101: J6.62(DIP_62) U14.26(Q19)
HEADER_B102: J6.63(DIP_63) U14.24(Q18)
HEADER_B103: J6.64(DIP_64) U14.23(Q17)
HEADER_B104: J6.65(DIP_65) U14.21(Q16)
HEADER_B105: J6.66(DIP_66) U14.20(Q15)
HEADER_B106: J6.67(DIP_67) U14.19(Q14)
HEADER_B107: J6.68(DIP_68) U14.17(Q13)
HEADER_B108: J6.69(DIP_69) U14.16(Q12)
HEADER_B109: J6.70(DIP_70) U14.15(Q11)
HEADER_B110: J6.71(DIP_71) U14.14(Q10)
HEADER_B111: J6.72(DIP_72) U14.13(Q9)
HEADER_B112: J6.73(DIP_73) U14.12(Q8)
HEADER_B113: J6.74(DIP_74) U14.10(Q7)
HEADER_B114: J6.75(DIP_75) U14.9(Q6)
HEADER_B115: J6.76(DIP_76) U14.8(Q5)
HEADER_B116: J6.77(DIP_77) U14.6(Q4)
HEADER_B117: J6.78(DIP_78) U14.5(Q3)
HEADER_B118: J6.79(DIP_79) U14.3(Q2)
HEADER_B119: J6.80(DIP_80) U14.2(Q1)
HEADER_C0: J13.41(DIP_41) U31.2(Q1)
HEADER_C1: J13.42(DIP_42) U31.3(Q2)
HEADER_C2: J13.43(DIP_43) U31.5(Q3)
HEADER_C3: J13.44(DIP_44) U31.6(Q4)
HEADER_C4: J13.45(DIP_45) U31.8(Q5)
HEADER_C5: J13.46(DIP_46) U31.9(Q6)
HEADER_C6: J13.47(DIP_47) U31.10(Q7)
HEADER_C7: J13.48(DIP_48) U31.12(Q8)
HEADER_C8: J13.49(DIP_49) U31.13(Q9)
HEADER_C9: J13.50(DIP_50) U31.14(Q10)
HEADER_C10: J13.51(DIP_51) U31.15(Q11)
HEADER_C11: J13.52(DIP_52) U31.16(Q12)
HEADER_C12: J13.53(DIP_53) U31.17(Q13)
HEADER_C13: J13.54(DIP_54) U31.19(Q14)
HEADER_C14: J13.55(DIP_55) U31.20(Q15)
HEADER_C15: J13.56(DIP_56) U31.21(Q16)
HEADER_C16: J13.57(DIP_57) U31.23(Q17)
HEADER_C17: J13.58(DIP_58) U31.24(Q18)
HEADER_C18: J13.59(DIP_59) U31.26(Q19)
HEADER_C19: J13.60(DIP_60) U31.27(Q20)
HEADER_C20: J13.61(DIP_61) U30.2(Q1)
HEADER_C21: J13.62(DIP_62) U30.3(Q2)
HEADER_C22: J13.63(DIP_63) U30.5(Q3)
HEADER_C23: J13.64(DIP_64) U30.6(Q4)
HEADER_C24: J13.65(DIP_65) U30.8(Q5)
HEADER_C25: J13.66(DIP_66) U30.9(Q6)
HEADER_C26: J13.67(DIP_67) U30.10(Q7)
HEADER_C27: J13.68(DIP_68) U30.12(Q8)
HEADER_C28: J13.69(DIP_69) U30.13(Q9)
HEADER_C29: J13.70(DIP_70) U30.14(Q10)
HEADER_C30: J13.71(DIP_71) U30.15(Q11)
HEADER_C31: J13.72(DIP_72) U30.16(Q12)
HEADER_C32: J13.73(DIP_73) U30.17(Q13)
HEADER_C33: J13.74(DIP_74) U30.19(Q14)
HEADER_C34: J13.75(DIP_75) U30.20(Q15)
HEADER_C35: J13.76(DIP_76) U30.21(Q16)
HEADER_C36: J13.77(DIP_77) U30.23(Q17)
HEADER_C37: J13.78(DIP_78) U30.24(Q18)
HEADER_C38: J13.79(DIP_79) U30.26(Q19)
HEADER_C39: J13.80(DIP_80) U30.27(Q20)
HEADER_C40: J12.41(DIP_41) U29.2(Q1)
HEADER_C41: J12.42(DIP_42) U29.3(Q2)
HEADER_C42: J12.43(DIP_43) U29.5(Q3)
HEADER_C43: J12.44(DIP_44) U29.6(Q4)
HEADER_C44: J12.45(DIP_45) U29.8(Q5)
HEADER_C45: J12.46(DIP_46) U29.9(Q6)
HEADER_C46: J12.47(DIP_47) U29.10(Q7)
HEADER_C47: J12.48(DIP_48) U29.12(Q8)
HEADER_C48: J12.49(DIP_49) U29.13(Q9)
HEADER_C49: J12.50(DIP_50) U29.14(Q10)
HEADER_C50: J12.51(DIP_51) U29.15(Q11)
HEADER_C51: J12.52(DIP_52) U29.16(Q12)
HEADER_C52: J12.53(DIP_53) U29.17(Q13)
HEADER_C53: J12.54(DIP_54) U29.19(Q14)
HEADER_C54: J12.55(DIP_55) U29.20(Q15)
HEADER_C55: J12.56(DIP_56) U29.21(Q16)
HEADER_C56: J12.57(DIP_57) U29.23(Q17)
HEADER_C57: J12.58(DIP_58) U29.24(Q18)
HEADER_C58: J12.59(DIP_59) U29.26(Q19)
HEADER_C59: J12.60(DIP_60) U29.27(Q20)
HEADER_C60: J12.61(DIP_61) U28.2(Q1)
HEADER_C61: J12.62(DIP_62) U28.3(Q2)
HEADER_C62: J12.63(DIP_63) U28.5(Q3)
HEADER_C63: J12.64(DIP_64) U28.6(Q4)
HEADER_C64: J12.65(DIP_65) U28.8(Q5)
HEADER_C65: J12.66(DIP_66) U28.9(Q6)
